# Altium PCB dc_cdi_cx500.PcbDoc (part 1 of 2)
Units mm, origin at the board's own origin, x right, y up, seen from the top; angles counter-clockwise.
Board outline 71.37 x 84.84 mm, 4 copper layers (Top, Power Plane, Ground Plane, Bottom), stack 1.586 mm thick; 162 components, 101 nets, 486 pads, 355 vias.
Unrouted connection lines stored in the file: 55.
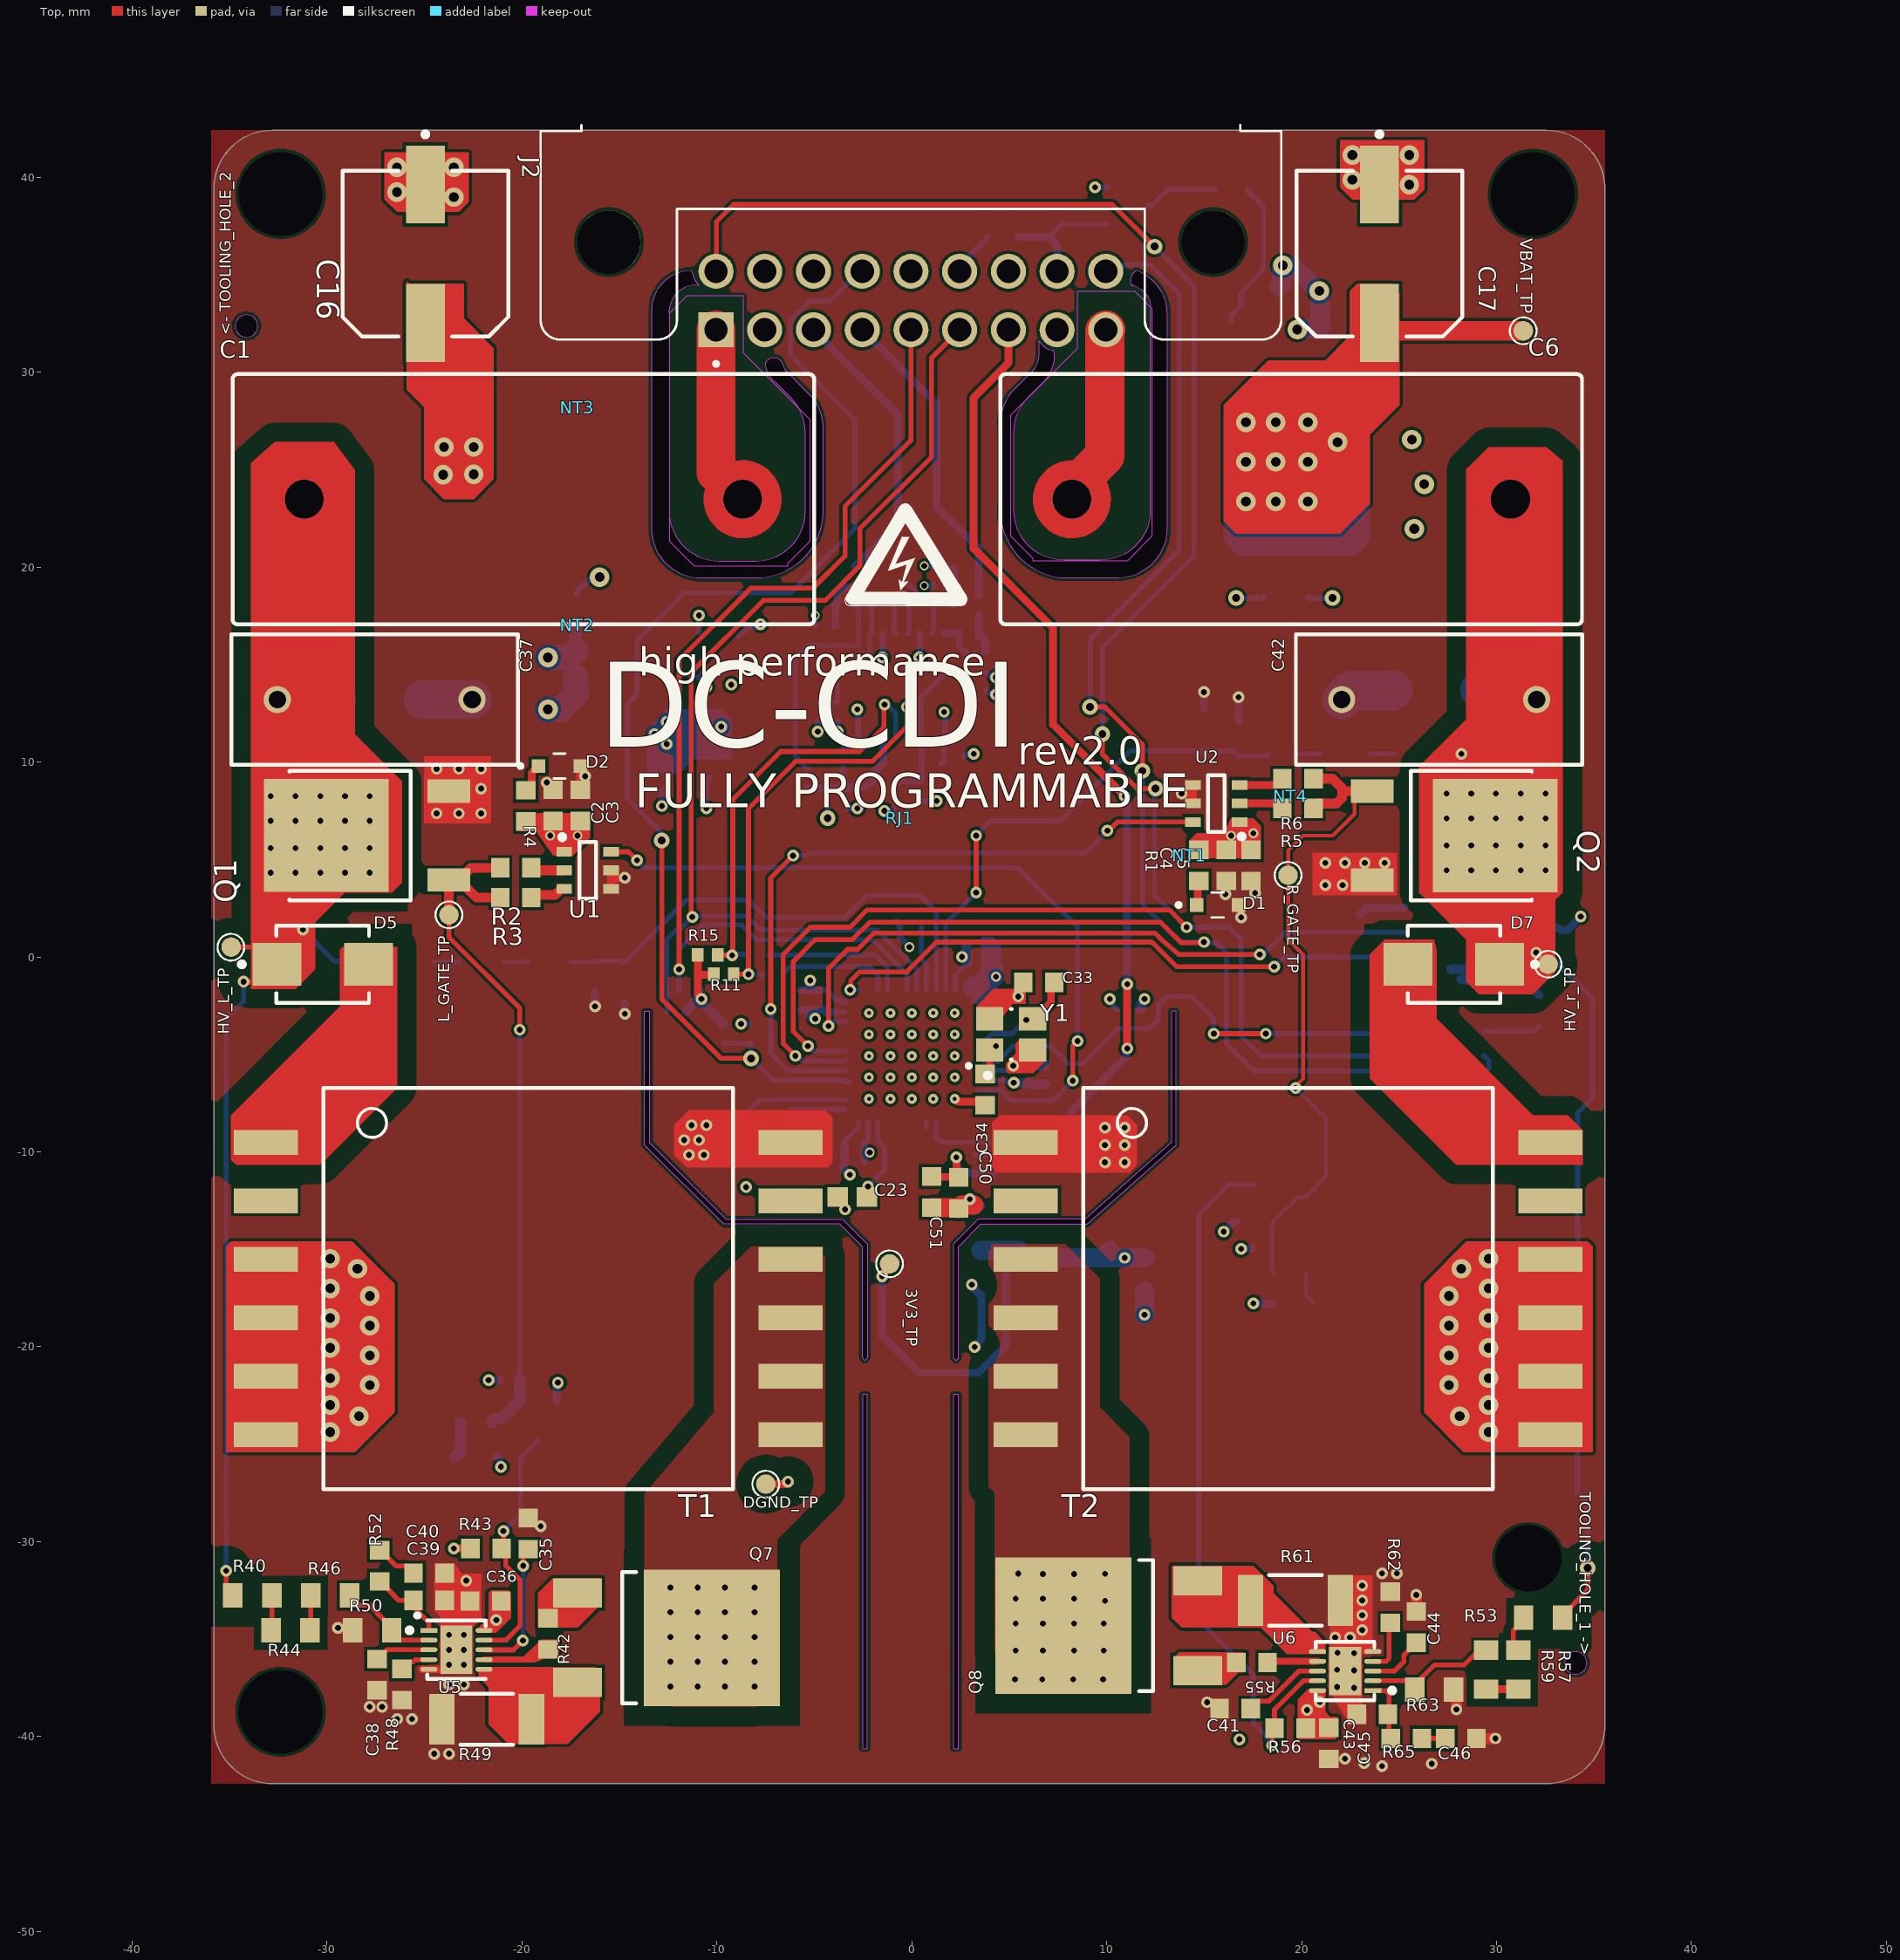
[diagram p0: Top view]
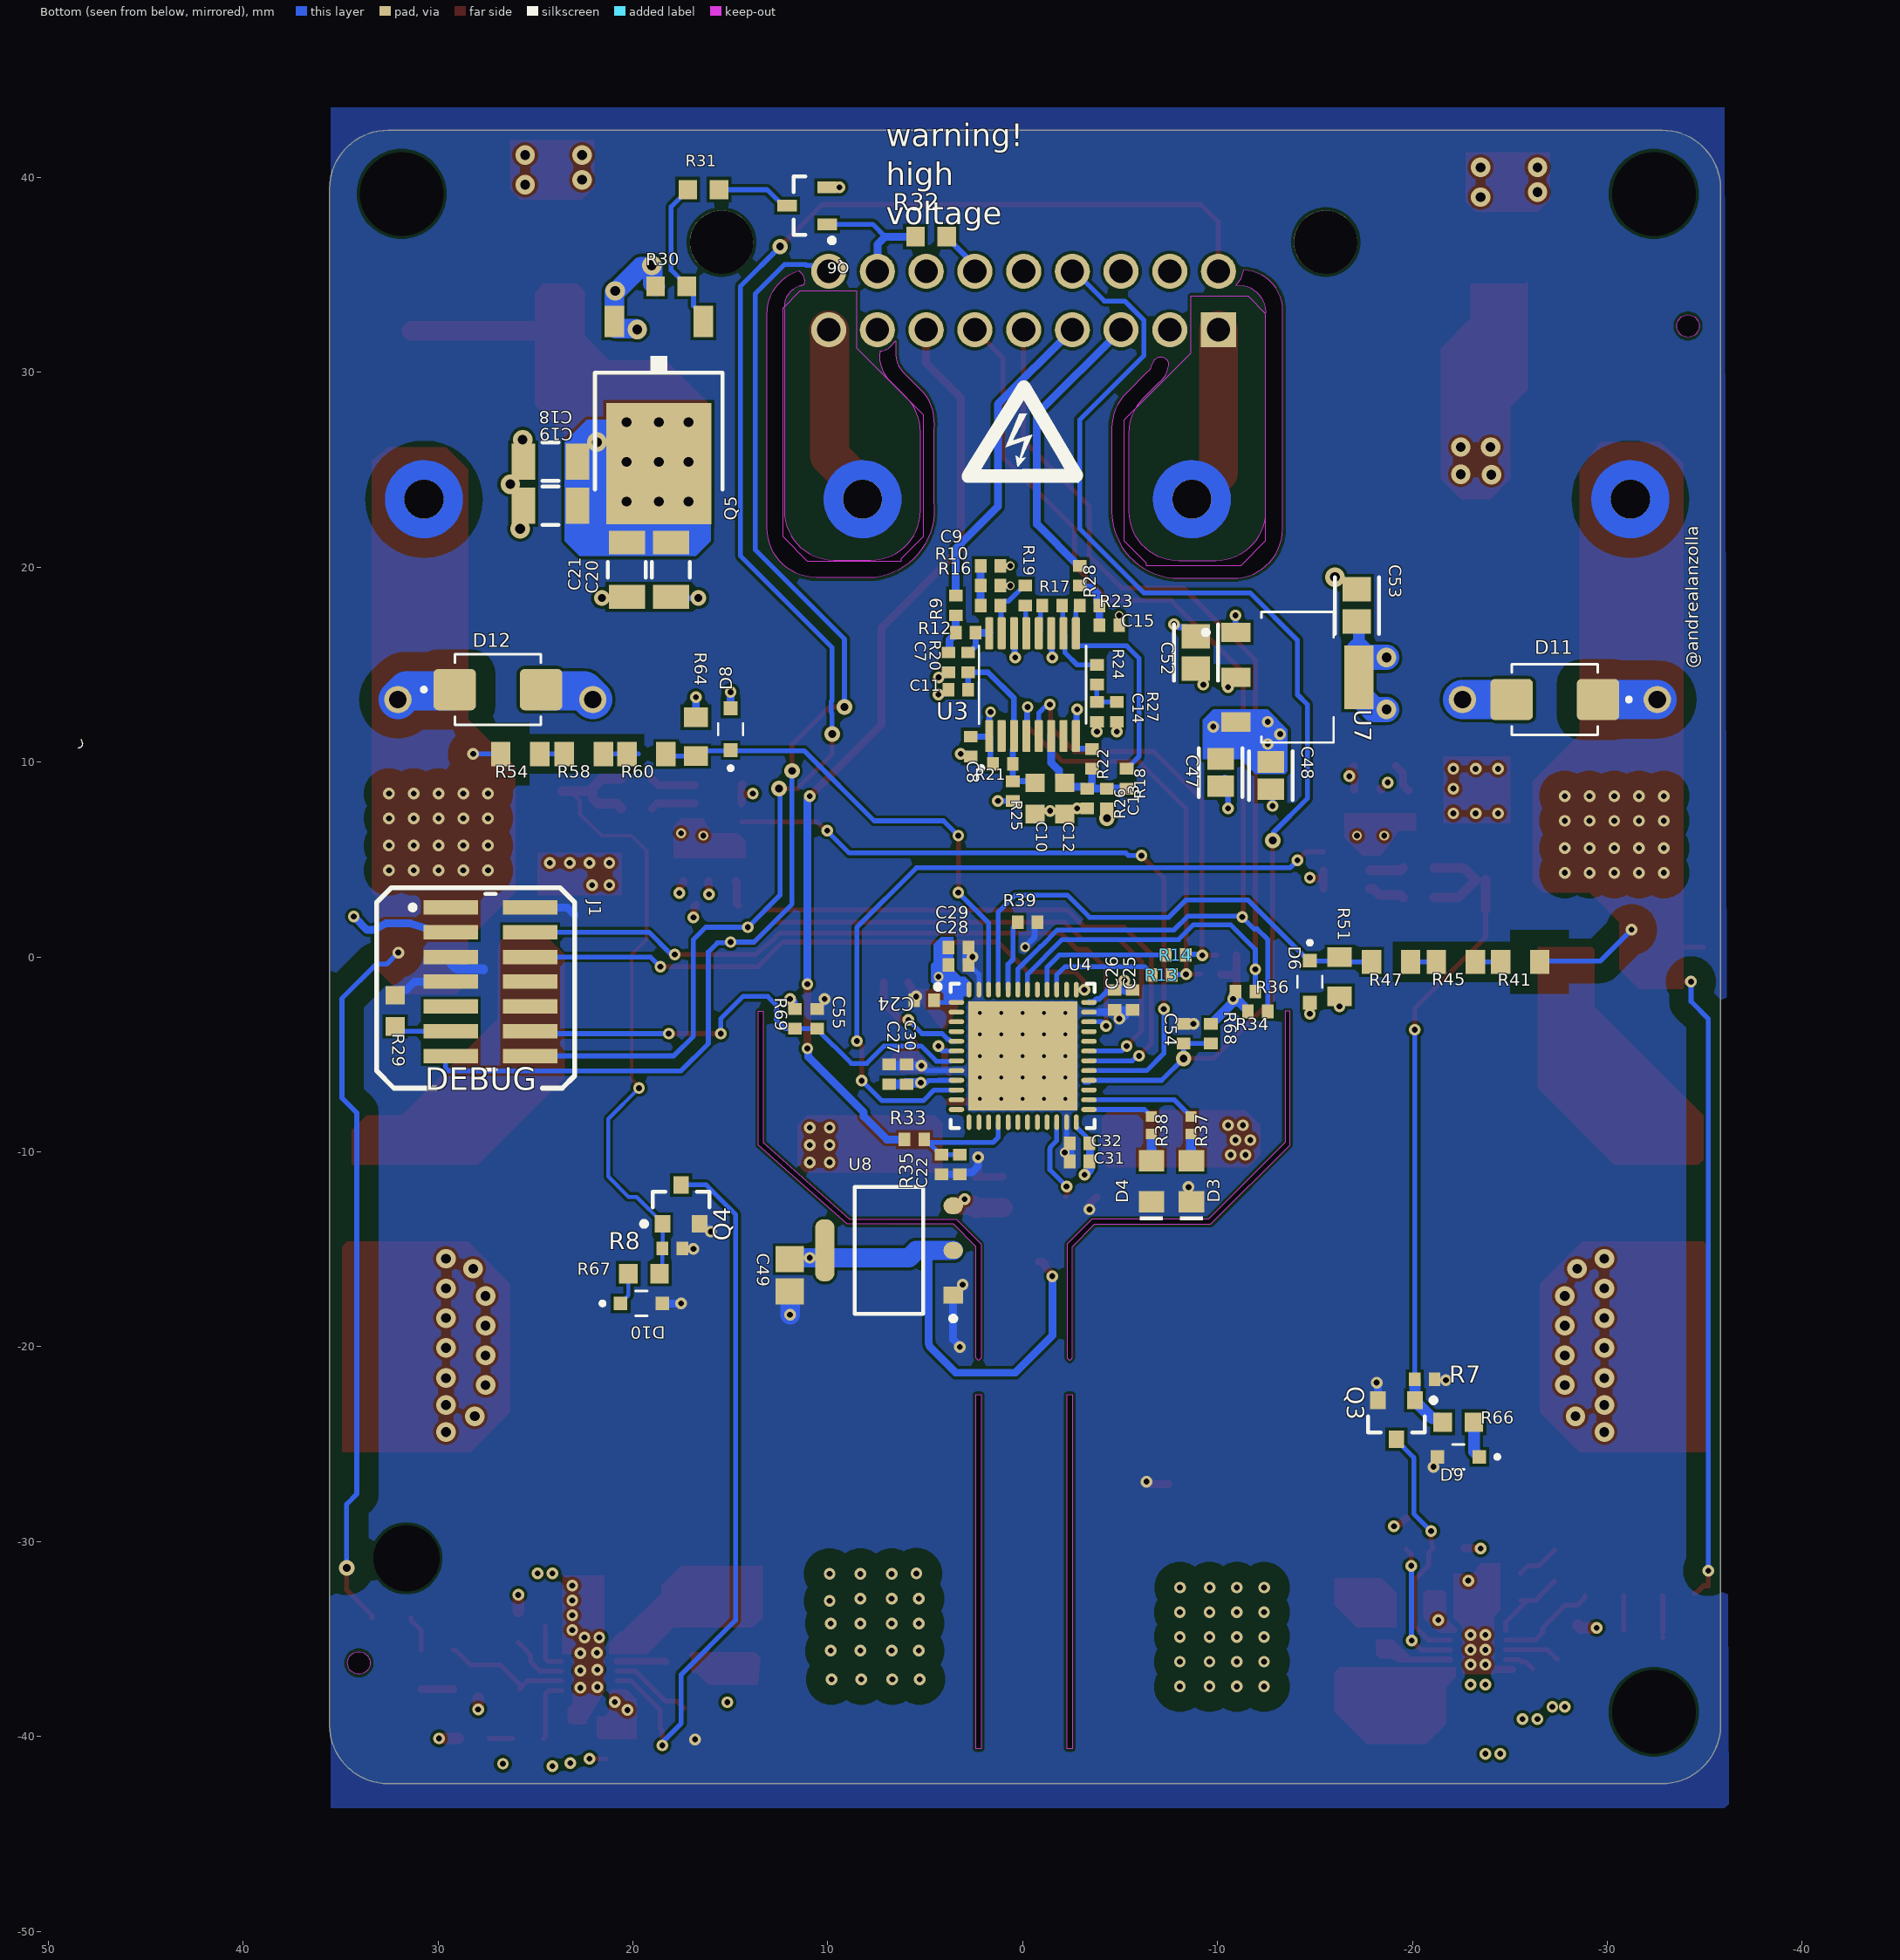
[diagram p1: Bottom view, seen from below]
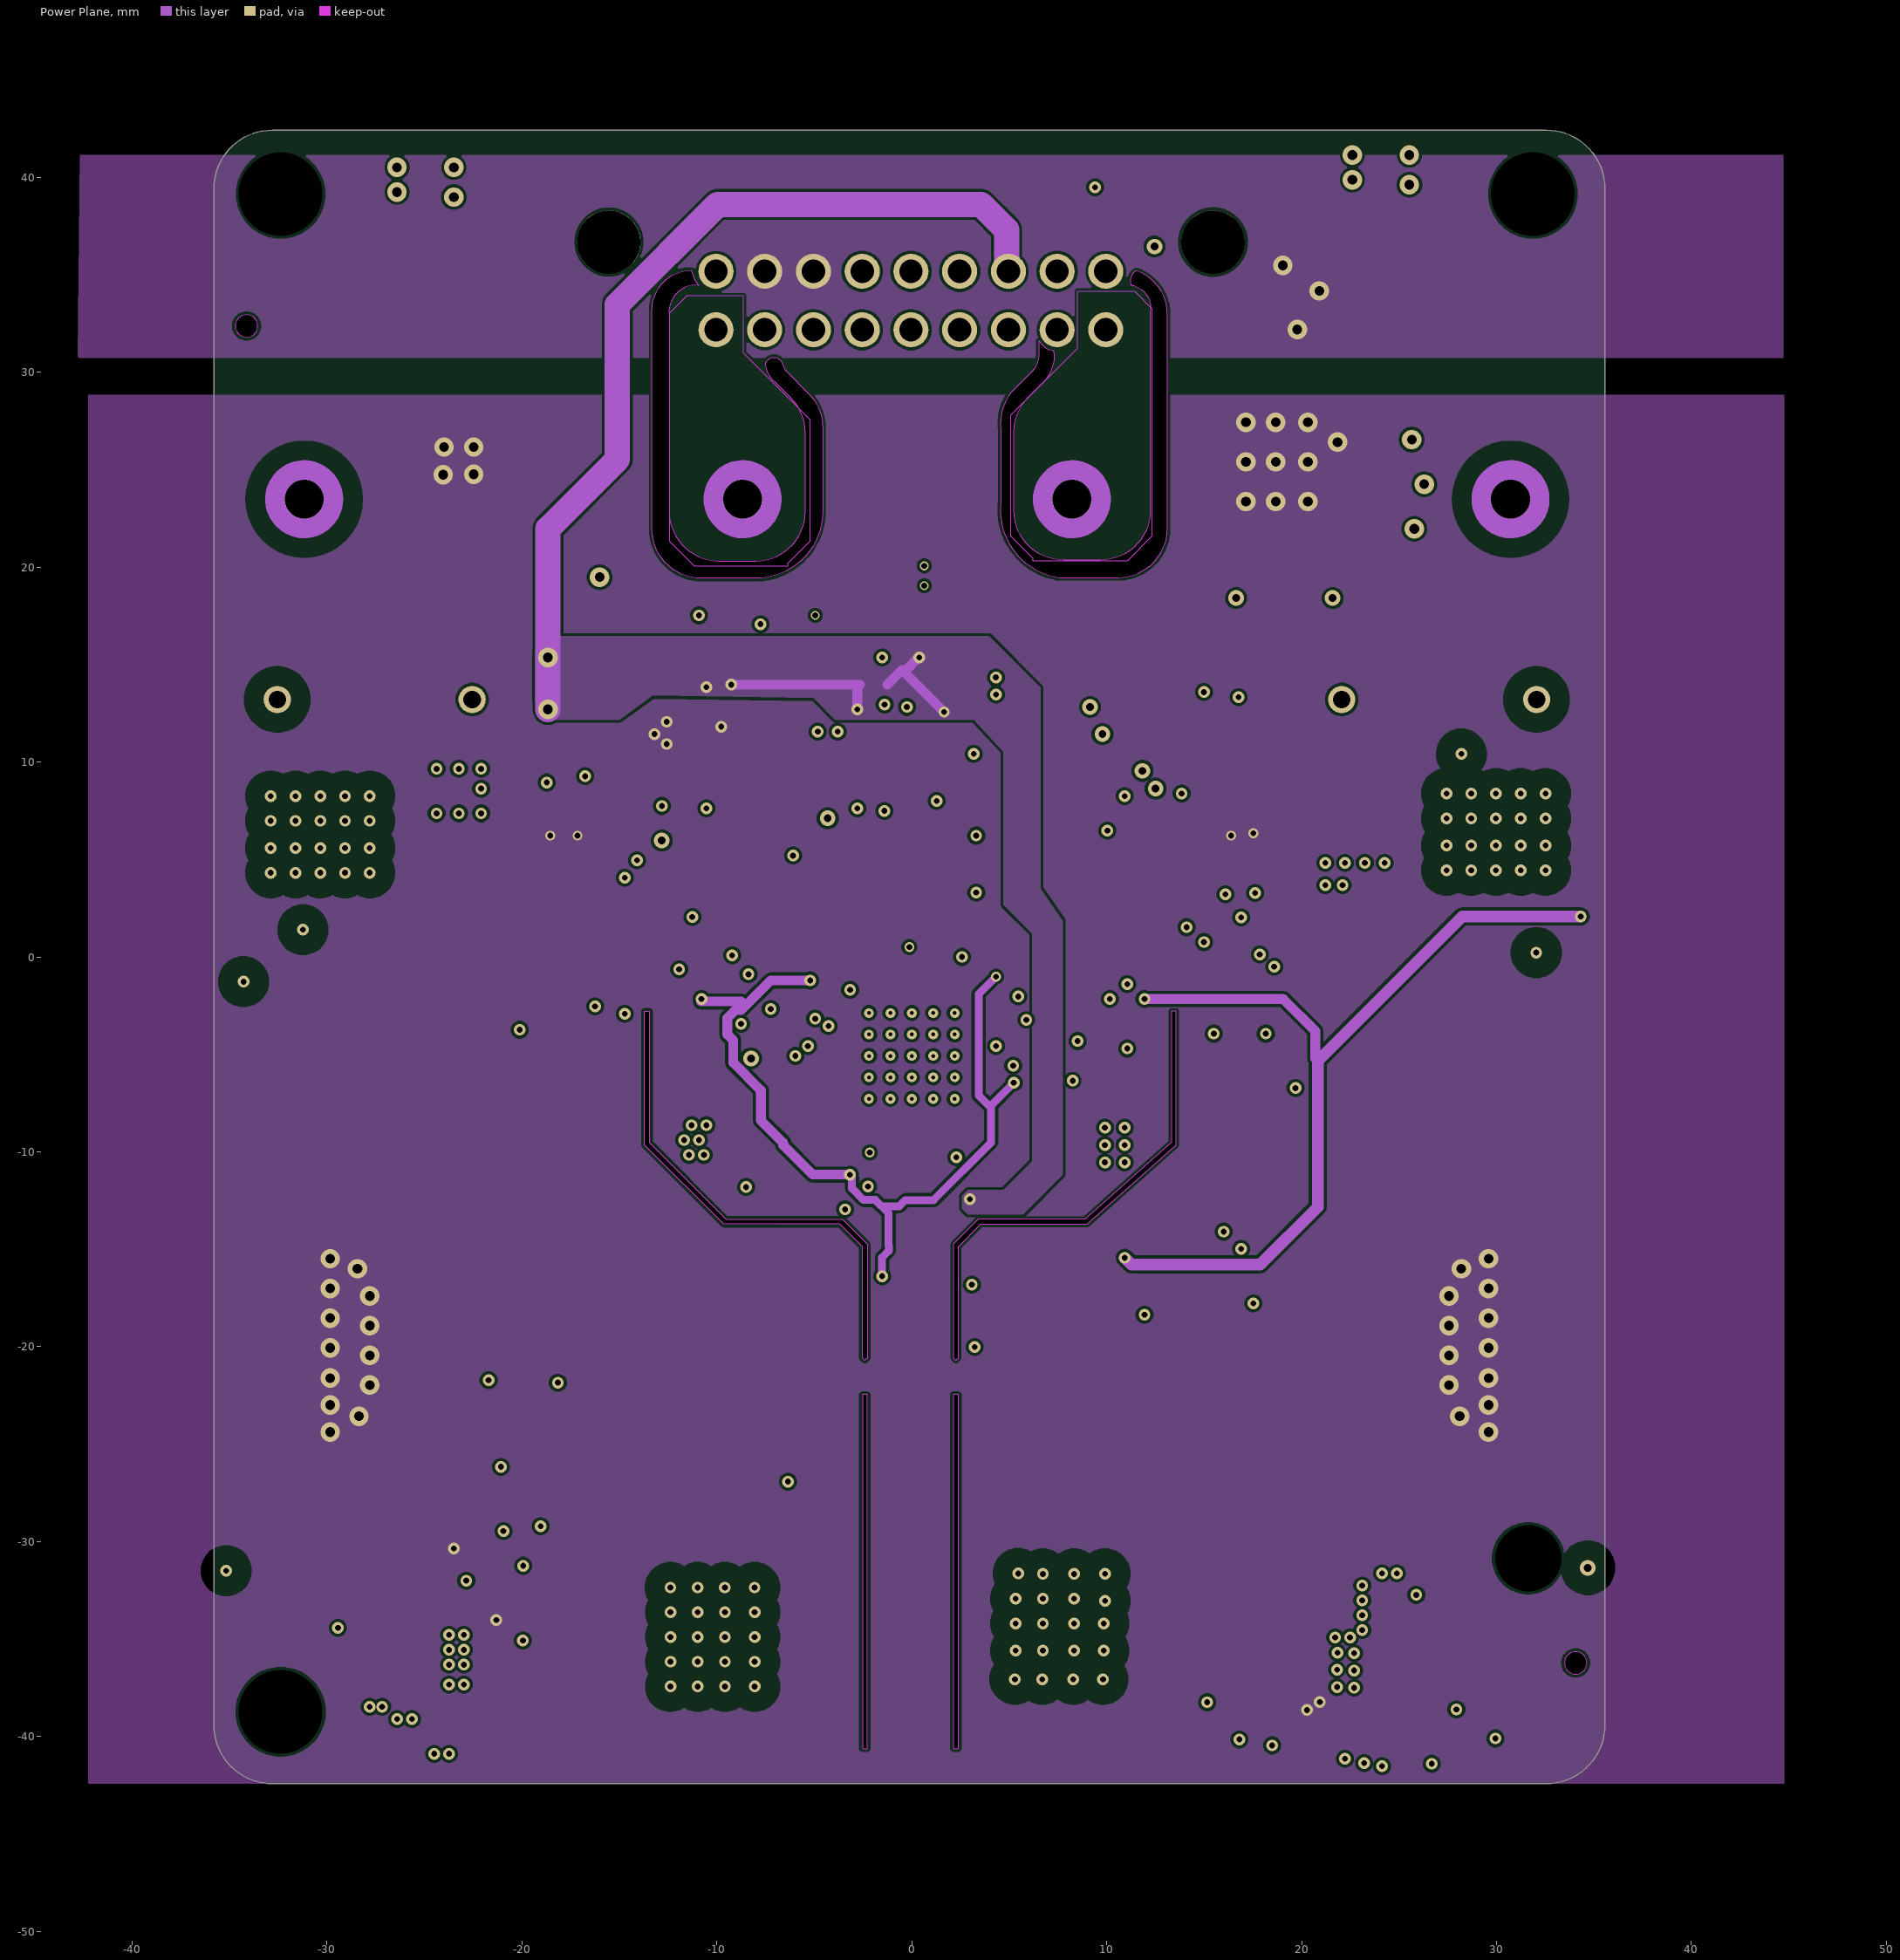
[diagram p2: Power Plane]
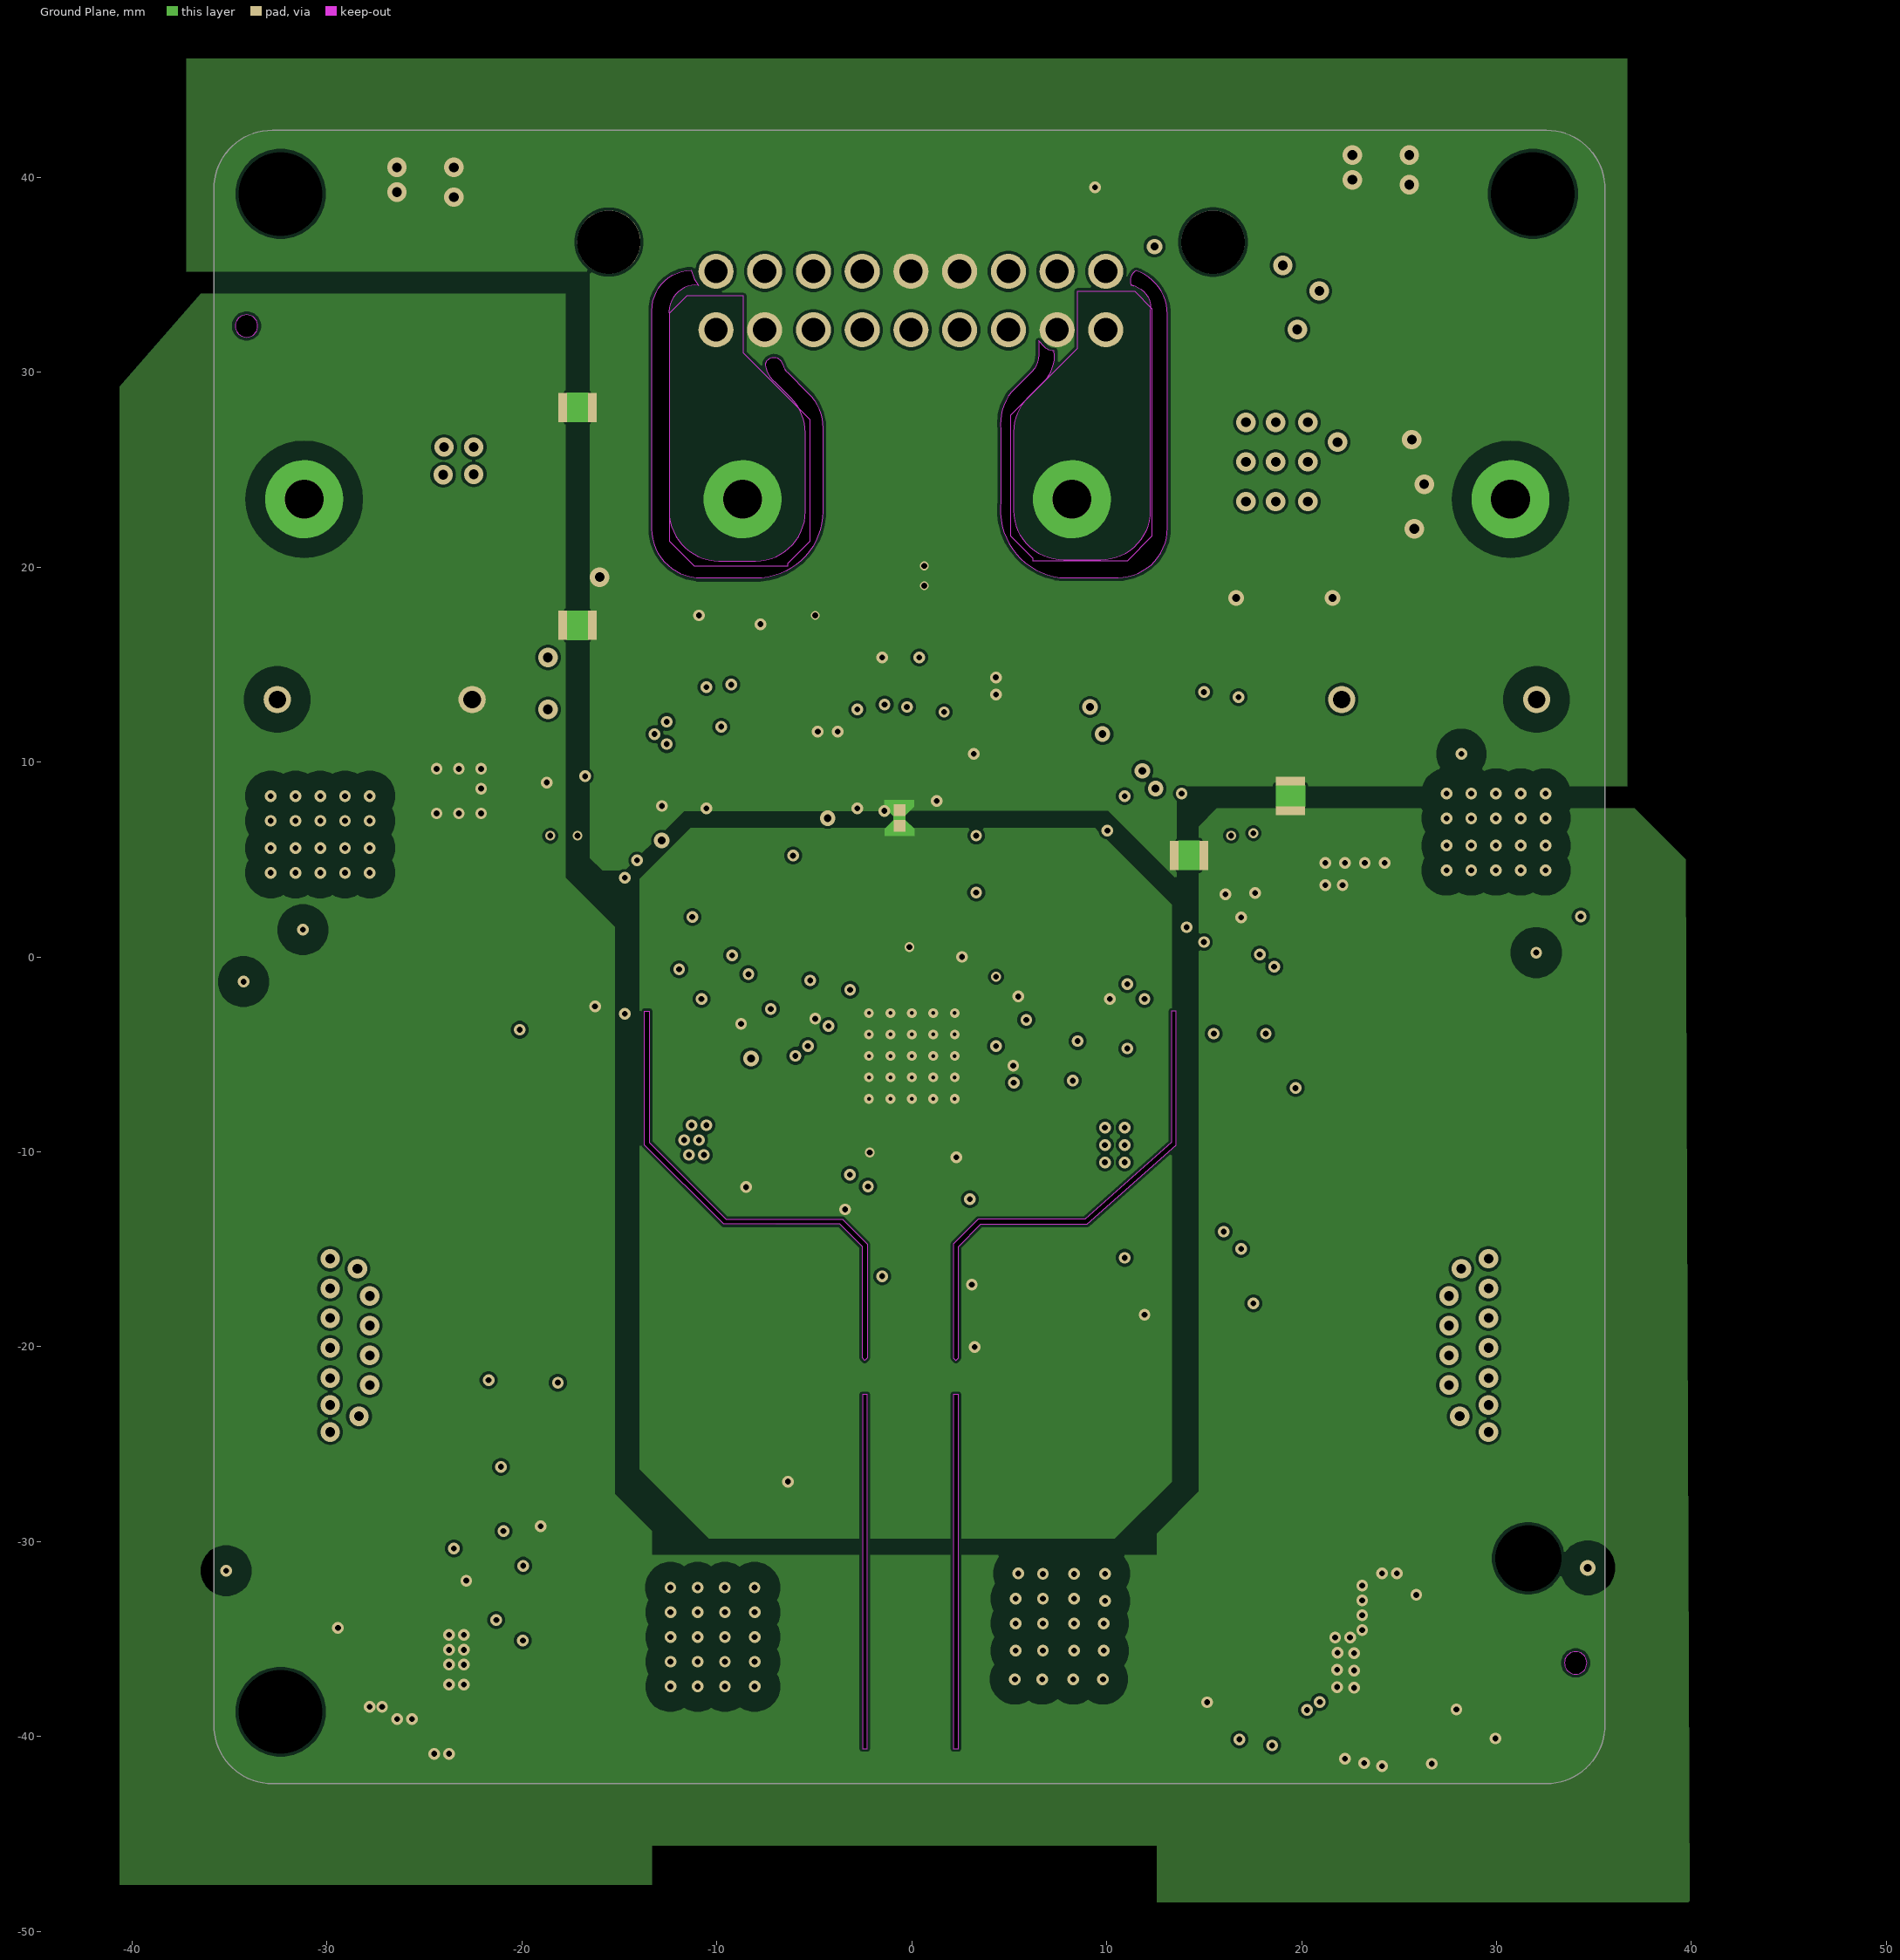
[diagram p3: Ground Plane]

## Layer stack, top to bottom
Top Solder: solder mask 0.0102, Solder Resist, Dk 3.5
Top: signal copper 0.035
Dielectric 2: prepreg 0.2104, PP-006, Dk 4.4
Power Plane: signal copper 0.0152
Dielectric 1: dielectric 1.065, FR-4, Dk 4.6
Ground Plane: signal copper 0.0152
Dielectric 3: prepreg 0.2104, PP-006, Dk 4.4
Bottom: signal copper 0.035
Bottom Solder: solder mask 0.0102, Solder Resist, Dk 3.5

## Board outline
-35.814,-39.418 -35.814,39.418 cw(c-32.814,39.418) -32.814,42.418 32.56,42.418 cw(c32.56,39.418) 35.56,39.418 35.56,-39.418 cw(c32.56,-39.418) 32.56,-42.418 -32.814,-42.418 cw(c-32.814,-39.418)
cut-out: -10.933,34.466 ccw(c-11.073,33.091) -12.446,32.931 -12.446,22.86 ccw(c-9.906,22.86) -9.906,20.32 -8.001,20.32 ccw(c-8.001,22.86) -5.461,22.86 -5.461,26.888 ccw(c-8,26.888) -6.205,28.684 -6.985,29.464 cw(c-6.166,30.522) -7.493,30.353 -7.493,30.48 cw(c-7.076,30.328) -6.731,30.607 -6.604,30.353 ccw(c-6.054,30.454) -6.372,29.994 -5.316,28.938 cw(c-7.111,27.142) -4.572,27.142 -4.572,22.867 cw(c-8.008,22.867) -8.008,19.431 -10.795,19.431 cw(c-10.795,21.971) -13.335,21.971 -13.335,33.15 cw(c-11.284,33.187) -11.321,35.238 -11.176,34.798
cut-out: 11.275,34.47 cw(c11.081,33.325) 12.227,33.13 12.227,22.897 cw(c9.687,22.897) 9.687,20.357 7.782,20.357 cw(c7.782,22.897) 5.242,22.897 5.242,26.925 cw(c7.782,26.925) 5.986,28.721 6.766,29.501 ccw(c5.421,30.847) 7.323,30.847 7.306,31.1 cw(c7.268,31.705) 6.814,31.303 6.512,31.605 6.512,30.898 cw(c5.287,30.898) 6.153,30.031 5.097,28.975 ccw(c7.157,27.38) 4.572,27.051 4.572,23.385 ccw(c8.032,22.928) 7.576,19.468 10.576,19.468 ccw(c10.576,22.008) 13.116,22.008 13.116,32.983 ccw(c10.78,32.983) 11.495,35.207 ccw(c11.813,34.685) 11.236,34.481 11.396,34.436
cut-out: 34.636,-36.229 ccw(c34.06,-36.229) 34.06,-35.653 ccw(c34.06,-36.229) 33.484,-36.229 ccw(c34.06,-36.229) 34.06,-36.805 ccw(c34.06,-36.229)
cut-out: -33.561,32.374 ccw(c-34.137,32.374) -34.137,32.95 ccw(c-34.137,32.374) -34.713,32.374 ccw(c-34.137,32.374) -34.137,31.798 ccw(c-34.137,32.374)
cut-out: 13.312,-9.525 8.89,-13.462 3.406,-13.462 2.136,-14.732 2.136,-20.574 2.263,-20.701 2.39,-20.574 2.39,-14.859 3.533,-13.716 6.839,-13.716 6.843,-13.711 6.848,-13.716 8.999,-13.711 13.566,-9.652 13.566,-2.794 13.312,-2.794
cut-out: 2.134,-22.463 2.134,-40.624 2.388,-40.624 2.388,-22.463
cut-out: -2.54,-22.463 -2.54,-40.624 -2.286,-40.624 -2.286,-22.463
cut-out: -13.462,-9.525 -9.525,-13.462 -3.556,-13.462 -2.286,-14.732 -2.286,-20.574 -2.413,-20.701 -2.54,-20.574 -2.54,-14.859 -3.683,-13.716 -6.989,-13.716 -6.993,-13.711 -6.998,-13.716 -9.652,-13.716 -13.716,-9.652 -13.716,-2.794 -13.462,-2.794

## Design rules (kind name [scope] priority, off if disabled: settings)
AssemblyTestpoint [All] p1 off: testpointundercomponent=TRUE minsize=1.016 maxsize=2.54 preferedsize=1.524 minholesize=0 maxholesize=1.016 preferedholesize=0.813 testpointgrid=0.025 usegrid=TRUE gridtolerance=0 allowsidetop=TRUE allowsidebottom=TRUE
Clearance Clearance_LT3758 [InComponent('U5') OR InComponent('U6')] p1: gap=0.1 ignorepadtopadclearanceinfootprint=FALSE
Clearance Clearance_HV [InNetClass('HV_NETS')] p2: gap=1 ignorepadtopadclearanceinfootprint=TRUE
Clearance Clearance_FBNets [InNetClass('FB_NETS')] p3: gap=0.4 ignorepadtopadclearanceinfootprint=TRUE
Clearance [All] p4: gap=0.15 ignorepadtopadclearanceinfootprint=FALSE
ComponentClearance [All] p1: gap=0.01 collisioncheckmode=3 verticalgap=0.01 showdistances=FALSE
FabricationTestpoint [All] p1 off: side=3 testpointundercomponent=TRUE minsize=1.016 maxsize=2.54 preferedsize=1.524 minholesize=0 maxholesize=1.016 preferedholesize=0.813 testpointgrid=0.025 allowsidetop=TRUE allowsidebottom=TRUE usegrid=TRUE gridoriginx=0 gridoriginy=-82.423 gridtolerance=0
HoleSize [All] p1: absolutevalues=TRUE maxlimit=5 minlimit=0.02 maxpercent=80.000 minpercent=20.000
HoleToHoleClearance [All] p1 off: gap=0.254 allowstackedmicrovias=TRUE
MinimumSolderMaskSliver [All] p1 off: minsoldermaskwidth=0.254
NetAntennae [All] p1 off: netantennaetolerance=0
PasteMaskExpansion [All] p1 off: expansion=0
PlaneClearance [InNet('GND') and OnLayer('Bottom')] p1: clearance=0.8
PlaneConnect [All] p1: planeconnectstyle=Direct reliefexpansion=0.508 reliefentries=4 reliefconductorwidth=0.254 reliefairgap=0.254
PolygonConnect [All] p1: connectstyle=Direct reliefconductorwidth=0.254 reliefentries=4 polygonreliefangle="90 Angle" airgapwidth=0.254
RoutingVias [Not InNet('dGND')] p1: holewidth=0.3 width=0.45 viastyle="Through Hole" minholewidth=0.3 minwidth=0.45 maxholewidth=0.5 maxwidth=1
RoutingVias RoutingVias_stitch_mcu [InNet('DGND')] p2: holewidth=0.3 width=0.5 viastyle="Through Hole" minholewidth=0.2 minwidth=0.4 maxholewidth=0.5 maxwidth=1
SilkToSilkClearance [All] p1 off: silktosilkclearance=0.254
SilkToSolderMaskClearance [IsPad] p1 off: minsilkscreentomaskgap=0.254 clearancetoexposedcopper=TRUE
SolderMaskExpansion [All] p1 off: expansion=0.102 istentingtop=FALSE
SolderMaskExpansion SolderMaskExpansion_1 [All] p2: expansion=0 istentingtop=FALSE
SupplyNets "Schematic Supply Nets_5" [InNet('3V3')] p1: voltage=0.000
SupplyNets "Schematic Supply Nets_4" [InNet('VBAT_0')] p2: voltage=0.000
SupplyNets "Schematic Supply Nets_3" [InNet('DGND')] p3: voltage=0.000
SupplyNets "Schematic Supply Nets_2" [InNet('5V0')] p4: voltage=0.000
SupplyNets "Schematic Supply Nets_1" [InNet('GND')] p5: voltage=0.000
SupplyNets "Schematic Supply Nets" [InNet('PGND')] p6: voltage=0.000
Width [All] p1: maxlimit=5 minlimit=0.1 preferedwidth=0.254
18 further rules are at their usual default settings.

## Classes and differential pairs
net class HV_NETS: L_HV NetD5_2 NetD7_2 NetQ7_4 NetQ8_4 R_HV
net class FB_NETS: NetR40_1 NetR41_1 NetR44_1 NetR45_1 NetR53_1 NetR54_1 NetR57_1 NetR58_1
component class LV_power: C47 C48 C49 C50 C51 C52 C53 U7 U8
component class logic: C22 C23 C24 C25 C26 C27 C28 C29 C30 C31 C32 C33 C34 C54 C55 D3 D4 R33 R34 R35 R36 R37 R38 R39 R68 R69 U4 Y1
component class input_signal_conditioning: C7 C8 C9 C10 C11 C12 C13 C14 C15 R9 R10 R11 R12 R13 R14 R15 R16 R17 R18 R19 R20 R21 R22 R23 R24 R25 R26 R27 R28 U3
component class input_output: C16 C17 C18 C19 C20 C21 J1 J2 NT1 NT2 NT3 NT4 Q5 Q6 R29 R30 R31 R32 RJ1
component class HV_power: C35 C36 C37 C38 C39 C40 C41 C42 C43 C44 C45 C46 D5 D6 D7 D8 Q7 Q8 R40 R41 R42 R43 R44 R45 R46 R47 R48 R49 R50 R51 R52 R53 R54 R55 R56 R57 R58 R59 R60 R61 R62 R63 R64 R65 T1 T2 U5 U6
component class cd_switching: C1 C2 C3 C4 C5 C6 D1 D2 D9 D10 D11 D12 Q1 Q2 Q3 Q4 R1 R2 R3 R4 R5 R6 R7 R8 R66 R67 U1 U2

## Components (designator, comment, footprint, x,y, rotation, side; value= is the part's Value field where it differs from the comment)
C1 "ECW-FA2J155J" 22,5mm_CAP -19.929,23.485 r180 top locked
C2 "Capacitor_0603" 0603_FP -18.409,7.769 r90 top value="100 nF"
C3 "Capacitor_0603" 0603_FP -17.012,7.769 r90 top value="100 nF"
C4 "Capacitor_0603" 0603_FP 16.129,4.699 r270 top value="100 nF"
C5 "Capacitor_0603" 0603_FP 17.399,4.699 r270 top value="100 nF"
C6 "ECW-FA2J155J" 22,5mm_CAP 19.467,23.485 r0 top locked
C7 "Capacitor_0402" 0402_fp 3.81,15.113 r270 bottom value="1 nF"
C8 "Capacitor_0402" 0402_fp 2.667,10.795 r270 bottom value="100 nF"
C9 "Capacitor_0402" 0402_fp 1.651,20.066 r180 bottom value="1 nF"
C10 "Capacitor_0603" 0603_FP -0.635,8.128 r270 bottom value="10 uF"
C11 "Capacitor_0402" 0402_fp 3.302,13.716 r0 bottom value="100 nF"
C12 "Capacitor_0603" 0603_FP -2.159,8.128 r270 bottom value="10 uF"
C13 "Capacitor_0402" 0402_fp -4.318,8.128 r270 bottom value="100 nF"
C14 "Capacitor_0402" 0402_fp -3.81,12.573 r270 bottom value="1 nF"
C15 "Capacitor_0402" 0402_fp -4.445,17.018 r180 bottom value="1 nF"
C16 "EEHZT1E221P" FP-EEH-F-MFG -24.96,36.085 r270 top
C17 "EEHZT1E221P" FP-EEH-F-MFG 23.994,36.085 r270 top
C18 "C1206X104J3GACTU" FP-C1206X104J3GACTU-MFG 24.229,25.413 r0 bottom
C19 "C1206X104J3GACTU" FP-C1206X104J3GACTU-MFG 24.229,23.153 r0 bottom
C20 "C1206X104J3GACTU" FP-C1206X104J3GACTU-MFG 18.047,19.871 r270 bottom
C21 "C1206X104J3GACTU" FP-C1206X104J3GACTU-MFG 20.307,19.871 r270 bottom
C22 "Capacitor_0402" 0402_fp 3.224,-10.648 r90 bottom value="1 nF"
C23 "0603ZD475MAT2A" CAPC1608X90X35NL15T15 -3.048,-12.319 r180 top
C24 "Capacitor_0402" 0402_fp 5.058,-2.225 r0 bottom value="100 nF"
C25 "Capacitor_0402" 0402_fp -5.636,-2.209 r270 bottom value="10 nF"
C26 "Capacitor_0402" 0402_fp -4.713,-2.209 r270 bottom value="10 nF"
C27 "Capacitor_0402" 0402_fp 6.858,-6.025 r90 bottom value="10 nF"
C28 "Capacitor_0402" 0402_fp 3.292,-0.412 r180 bottom value="10 nF"
C29 "Capacitor_0402" 0402_fp 3.292,0.488 r180 bottom value="10 nF"
C30 "Capacitor_0402" 0402_fp 5.95,-6.025 r90 bottom value="10 nF"
C31 "Capacitor_0402" 0402_fp -2.92,-10.494 r0 bottom value="10 nF"
C32 "Capacitor_0402" 0402_fp -2.92,-9.559 r0 bottom value="10 nF"
C33 "Capacitor_0603" 0603_FP 6.513,-1.303 r180 top value="10 pF"
C34 "Capacitor_0603" 0603_FP 3.763,-6.803 r270 top value="10 pF"
C35 "GRM21BR61C475KA88L" 0603_FP -19.685,-29.591 r270 top value="4.7 uF"
C36 "GRM21BR61C475KA88L" 0603_FP -21.873,-33.055 r180 top value=".22 uF"
C37 "890283323005CS" WCAP-FTBP_L13W5.5H11 -27.559,13.208 r180 top
C38 "Capacitor_0603" 0603_FP -27.432,-36.83 r90 top value="100 pF"
C39 "Capacitor_0603" 0603_FP -24.765,-33.02 r180 top value="22 pF"
C40 "Capacitor_0603" 0603_FP -24.765,-31.623 r180 top value="470 pF"
C41 "Capacitor_0603" 0603_FP 16.586,-38.564 r0 top value="4.7 uF"
C42 "890283323005CS" WCAP-FTBP_L13W5.5H11 27.055,13.208 r0 top
C43 "GRM21BR61C475KA88L" 0603_FP 21.396,-40.357 r270 top value=".22 uF"
C44 "Capacitor_0603" 0603_FP 25.881,-34.388 r90 top value="100 pF"
C45 "Capacitor_0603" 0603_FP 23.622,-38.862 r180 top value="22 pF"
C46 "Capacitor_0603" 0603_FP 28.167,-40.103 r0 top value="470 pF"
C47 "CC0805MKX5R8BB226" FP-CC0805-0_2-1_45-IPC_C -10.159,9.464 r270 bottom
C48 "CC0805MKX5R8BB226" FP-CC0805-0_2-1_45-IPC_C -12.728,9.302 r270 bottom
C49 "0805ZG106ZAT2A" CAPC2013X152X50NL20T25 11.955,-16.332 r90 bottom
C50 "Capacitor_0603" 0603_FP 2.404,-12.111 r90 top value="100 nF"
C51 "Capacitor_0603" 0603_FP 1.016,-12.065 r90 top value="100 nF"
C52 "GRM21BR61A476ME15K" FP-GRM21B-0_2-e0_2_0_7-IPC_B -8.89,15.621 r90 bottom
C53 "GRM21BR61A476ME15K" FP-GRM21B-0_2-e0_2_0_7-IPC_B -17.145,18.034 r90 bottom
C54 "Capacitor_0402" 0402_fp -8.255,-3.937 r90 bottom value="100 nF"
C55 "Capacitor_0402" 0402_fp 10.541,-3.175 r90 bottom value="100 nF"
D1 "BZT52B15SH_RRG" DIO_BZT52B15SH_RRG 15.689,2.667 r0 top
D2 "BZT52B15SH_RRG" DIO_BZT52B15SH_RRG -18.076,9.796 r0 top
D3 "150080RS75000" WL-SMCW_0805_150080xx75000 -8.658,-11.509 r90 bottom
D4 "150080GS75000" WL-SMCW_0805_150080xx75000 -6.604,-11.509 r90 bottom
D5 "S3JB" FP-403AF-MFG -30.226,-0.381 r0 top
D6 "CZRQR3V3B-HF" DIO_BZT52B15SH_RRG -14.732,-1.27 r270 bottom
D7 "S3JB" FP-403AF-MFG 27.814,-0.381 r180 top
D8 "BZT52B15SH_RRG" DIO_BZT52B15SH_RRG 14.986,11.684 r90 bottom
D9 "BZT52B15SH_RRG" DIO_BZT52B15SH_RRG -22.352,-25.654 r0 bottom
D10 "BZT52B15SH_RRG" DIO_BZT52B15SH_RRG 19.558,-17.78 r180 bottom
D11 "SMBJ400A" DIOM5436X261N -27.305,13.208 r0 bottom
D12 "SMBJ400A" DIOM5436X261N 26.924,13.716 r180 bottom
J1 "FTSH-107-01-F-DV-K" FP-FTSH-107-01-F-DV-K-MFG 27.305,-1.27 r270 bottom
J2 "MX23A18NF1" JAE_MX23A18NF1 -0.047,36.679 r180 top
NT1 "GROUND_NET_TIE" NET_TIE_GND#1 14.224,5.207 r270 top net-tie
NT2 "GROUND_NET_TIE" NET_TIE_GND#1 -17.161,17.018 r90 top net-tie
NT3 "GROUND_NET_TIE" NET_TIE_GND#1 -17.161,28.194 r90 top net-tie
NT4 "GROUND_NET_TIE" NET_TIE_GND#2 19.431,8.255 r0 top net-tie
Q1 "IPD60R180C7ATMA1" FP-PG-TO252-3-MFG#1 -28.829,6.229 r90 top
Q2 "IPD60R180C7ATMA1" FP-PG-TO252-3-MFG#1 28.702,6.223 r270 top
Q3 "MGSF1N03LT1G" ONSC-SOT-23-3-318-08_V -19.177,-23.749 r270 bottom
Q4 "MGSF1N03LT1G" ONSC-SOT-23-3-318-08_V 17.526,-12.7 r90 bottom
Q5 "FDD4141" TO252 18.669,27.813 r0 bottom
Q6 "BSS316N" SOT95P260X110-3N 11.058,38.542 r0 bottom
Q7 "IPD50R280CE" FP-PG-TO252-3-MFG#2 -12.585,-34.936 r270 top
Q8 "IPD50R280CE" FP-PG-TO252-3-MFG#2 10.1,-34.314 r90 top
R1 "Resistor_0603" 0603_FP 14.732,4.699 r90 top value="470 Ohm"
R2 "Resistor_0603" 0603_FP -20.32,4.572 r0 top value="10 Ω"
R3 "Resistor_0603" 0603_FP -20.32,3.048 r0 top value="120 Ω"
R4 "Resistor_0603" 0603_FP -19.812,7.747 r270 top value="470 Ohm"
R5 "Resistor_0603" 0603_FP 19.812,7.62 r180 top value="10 Ω"
R6 "Resistor_0603" 0603_FP 19.812,9.144 r180 top value="120 Ω"
R7 "Resistor_0402" 0402_fp -20.628,-21.674 r180 bottom value="10 kOhm"
R8 "Resistor_0402" 0402_fp 17.975,-14.957 r180 bottom value="10 kOhm"
R9 "Resistor_0402" 0402_fp 3.429,18.034 r90 bottom value="10 kΩ"
R10 "Resistor_0402" 0402_fp 1.651,19.05 r180 bottom value="10 kΩ"
R11 "Resistor_0402" 0402_fp -9.652,-0.889 r0 top value="12 kΩ"
R12 "Resistor_0402" 0402_fp 2.921,16.637 r180 bottom value="12 kΩ"
R13 "Resistor_0402" 0402_fp -7.135,-0.92 r180 bottom value="1 kΩ"
R14 "Resistor_0402" 0402_fp -7.854,0.099 r180 bottom value="1 kΩ"
R15 "Resistor_0402" 0402_fp -10.474,0.099 r0 top value="12 kΩ"
R16 "Resistor_0402" 0402_fp 1.651,18.034 r180 bottom value="12 kΩ"
R17 "Resistor_0402" 0402_fp -1.516,18.028 r180 bottom value="12 kΩ"
R18 "Resistor_0402" 0402_fp -5.334,9.144 r90 bottom value="12 kΩ"
R19 "Resistor_0402" 0402_fp -0.127,18.542 r90 bottom value="12 kΩ"
R20 "Resistor_0402" 0402_fp 2.794,15.113 r90 bottom value="12 kΩ"
R21 "Resistor_0402" 0402_fp 1.016,9.906 r0 bottom value="1 kΩ"
R22 "Resistor_0402" 0402_fp -3.556,10.16 r90 bottom value="1 kΩ"
R23 "Resistor_0402" 0402_fp -3.429,18.034 r0 bottom value="12 kΩ"
R24 "Resistor_0402" 0402_fp -3.81,14.478 r90 bottom value="12 kΩ"
R25 "Resistor_0402" 0402_fp 0.508,8.509 r270 bottom value="1 kΩ"
R26 "Resistor_0402" 0402_fp -3.302,8.128 r270 bottom value="1 kΩ"
R27 "Resistor_0402" 0402_fp -4.826,12.573 r270 bottom value="10 kΩ"
R28 "Resistor_0402" 0402_fp -2.921,19.558 r90 bottom value="10 kΩ"
R29 "Resistor_0603" 0603_FP 32.195,-2.768 r90 bottom value="10 kOhm"
R30 "Resistor_0603" 0603_FP 18.034,34.417 r0 bottom value="10 kOhm"
R31 "Resistor_0603" 0603_FP 16.383,39.37 r0 bottom value="1 kOhm"
R32 "Resistor_0603" 0603_FP 4.699,36.957 r0 bottom value="10 kOhm"
R33 "Resistor_0402" 0402_fp 5.558,-9.37 r180 bottom value="12 kΩ"
R34 "Resistor_0402" 0402_fp -12.065,-2.794 r180 bottom value="4.7 kΩ"
R35 "Resistor_0402" 0402_fp 4.166,-10.648 r90 bottom value="22 kΩ"
R36 "Resistor_0402" 0402_fp -11.43,-1.778 r180 bottom value="4.7 kΩ"
R37 "MCS04020D5600BE100" RESC1005X37X20NL05T10 -8.636,-8.636 r270 bottom
R38 "MCS04020D5600BE100" RESC1005X37X20NL05T10 -6.604,-8.636 r270 bottom
R39 "Resistor_0402" 0402_fp -0.254,1.778 r180 bottom value="10 kΩ"
R40 "R_0805" 0805_FP -33.837,-32.766 r180 top value="1 MΩ"
R41 "R_0805" 0805_FP -25.527,-0.254 r180 bottom value="1 MΩ"
R42 "Resistor_0603" 0603_FP -18.66,-34.737 r90 top value="22 Ω"
R43 "Resistor_0603" 0603_FP -21.844,-30.353 r180 top value="470 kOhm"
R44 "R_0805" 0805_FP -31.877,-34.544 r180 top value="1 MΩ"
R45 "R_0805" 0805_FP -22.225,-0.254 r180 bottom value="1 MΩ"
R46 "R_0805" 0805_FP -29.845,-32.766 r180 top value="1 MΩ"
R47 "R_0805" 0805_FP -18.907,-0.254 r180 bottom value="1 MΩ"
R48 "Resistor_0603" 0603_FP -26.161,-37.33 r90 top value="140 kOhm"
R49 "CSRN2010FK20L0" FP-CSRN2010-IPC_B -21.813,-39.122 r0 top
R50 "R_0805" 0805_FP -27.686,-34.544 r0 top value="13.7 kΩ"
R51 "R_0805" 0805_FP -16.256,-1.016 r90 bottom value="24 kΩ"
R52 "Resistor_0603" 0603_FP -27.305,-31.242 r270 top value="82 kΩ"
R53 "R_0805" 0805_FP 32.385,-33.909 r0 top value="1 MΩ"
R54 "R_0805" 0805_FP 25.781,10.414 r0 bottom value="1 MΩ"
R55 "Resistor_0603" 0603_FP 17.45,-36.209 r180 top value="22 Ω"
R56 "Resistor_0603" 0603_FP 19.408,-39.582 r180 top value="470 kΩ"
R57 "R_0805" 0805_FP 31.115,-36.576 r90 top value="1 MΩ"
R58 "R_0805" 0805_FP 22.517,10.414 r0 bottom value="1 MΩ"
R59 "R_0805" 0805_FP 29.464,-36.576 r270 top value="1 MΩ"
R60 "R_0805" 0805_FP 19.304,10.414 r0 bottom value="1 MΩ"
R61 "CSRN2010FK20L0" FP-CSRN2010-IPC_B 19.685,-33.02 r180 top
R62 "Resistor_0603" 0603_FP 24.55,-33.37 r90 top value="140 kΩ"
R63 "R_0805" 0805_FP 26.797,-37.592 r180 top value="13.7 kΩ"
R64 "R_0805" 0805_FP 16.764,11.303 r270 bottom value="24 kΩ"
R65 "Resistor_0603" 0603_FP 25.373,-40.103 r0 top value="82 kΩ"
R66 "Resistor_0603" 0603_FP -22.352,-23.876 r180 bottom value="470 Ohm"
R67 "Resistor_0603" 0603_FP 19.431,-16.256 r0 bottom value="470 Ohm"
R68 "Resistor_0402" 0402_fp -9.652,-3.937 r90 bottom value="4.7 kΩ"
R69 "Resistor_0402" 0402_fp 11.684,-3.175 r90 bottom value="4.7 kΩ"
RJ1 "Net Tie 12x8mil" SHORT06-FP -0.635,7.131 r270 top net-tie
T1 "DA2034-AL" DA2034-AL -19.685,-17.018 r0 top
T2 "DA2034-AL" DA2034-AL 19.304,-17.018 r0 top
U1 "1EDN7511B" SOT95P280X145-6N-7-V -16.637,4.445 r0 top
U2 "1EDN7511B" SOT95P280X145-6N-7-V 15.621,7.874 r180 top
U3 "MAX9927AEE+" SOP63P602X175-16N -0.508,13.97 r90 bottom
U4 "STM32F411CEU6" STM-UFQFPN48_L 0,-5.08 r180 bottom
U5 "LT3758EDD#PBF" FP-DD-10-05-08-1699-IPC_B -23.364,-35.555 r0 top
U6 "LT3758EDD#PBF" FP-DD-10-05-08-1699-IPC_B 22.233,-36.645 r180 top
U7 "LT1117CST-3.3#TRPBF" REG_LT1117CST-3.3#TRPBF -14.097,14.351 r180 bottom
U8 "AMS1117-3.3" FP-AMS1117-IPC_C 6.858,-15.058 r0 bottom
Y1 "NX3225GA-16.000M-STD-CRG-2" FP-NX3225GA-MFG 5.096,-3.978 r0 top

## Footprints (in the part's own frame and the unit in brackets; to place one, negate y for a bottom-side part, rotate by r counter-clockwise, add the part's x,y. Pads: shape width x height; smd on the part's side, far side on the other; paste and mask are expansions set on the pad)
22,5mm_CAP [mm]
  round 2 hole 2 mask-2539.97: 1(-11.25,0) 2(11.25,0)
  Top circle w2: c11.25,0 r1
  Top circle w2: c-11.25,0 r1
  Power Plane circle w2: c11.25,0 r1
  Power Plane circle w2: c-11.25,0 r1
  Ground Plane circle w2: c11.25,0 r1
  Ground Plane circle w2: c-11.25,0 r1
  Bottom circle w2: c11.25,0 r1
  Bottom circle w2: c-11.25,0 r1
  silkscreen extent -14.92,-6.42 14.92,6.42
0402_fp [mm]
  rect 0.6x0.7 smd mask+0.05: 1(-0.508,0) 2(0.508,0)
0603_FP [mm]
  rect 0.95x1 smd mask+0.05: 1(-0.8,0) 2(0.8,0)
0805_FP [mm]
  rect 1x1.25 smd mask+0.05: 1(-1,0) 2(1,0)
CAPC1608X90X35NL15T15 [mm] "Chip Capacitor, 2-Leads, Body 1.60x0.81mm, IPC Medium Density"
  rect 1.05x1 smd: 1(-0.75,0) 2(0.75,0)
  body extent -0.88,-0.48 0.87,0.48, height 0.9
CAPC2013X152X50NL20T25 [mm] "Chip Capacitor, 2-Leads, Body 2.01x1.25mm, IPC Medium Density"
  rect 1.35x1.45 smd: 1(-0.825,0) 2(0.825,0)
  body extent -1.1,-0.72 1.11,0.72, height 1.52
DA2034-AL [mm]
  rect 3.3x1.27 smd: P$1(-13.46,7.5) P$2(-13.46,4.5) P$3(-13.46,1.5) P$4(-13.46,-1.5) P$5(-13.46,-4.5) P$6(-13.46,-7.5) P$7(13.46,-7.5) P$8(13.46,-4.5) P$9(13.46,-1.5) P$10(13.46,1.5) P$11(13.46,4.5) P$12(13.46,7.5)
  silkscreen extent -10.5,-10.29 10.5,10.29, body extent -14.33,-10.29 14.33,10.29, height 11.18
DIO_BZT52B15SH_RRG [mm]
  rect 0.7x0.7 smd paste+0 mask+0.102: 1(-1.075,0) 2(1.075,0)
  silkscreen extent -2.1,-0.64 0.3,0.64, body extent -1.25,-0.64 1.25,0.64, height 1.1
DIOM5436X261N [mm]
  rrect23% 2.18x2.12 smd paste+0 mask+0.102: 1(-2.215,0) 2(2.215,0)
  silkscreen extent -3.9,-1.81 2.2,1.81, body extent -2.67,-1.81 2.67,1.81, height 2.65
FP-403AF-MFG [mm]
  rect 2.5x2.2 smd paste+0 mask+0: 1(-2.35,0) 2(2.35,0)
  silkscreen extent -4.27,-1.98 2.38,1.98, body extent -3.7,-2.07 3.7,2.07, height 0.25
FP-AMS1117-IPC_C [mm]
  rect 1.004x0.872 smd paste+0 mask+0: 1(-3.295,2.29)
  rrect100% 1.004x0.872 smd paste+0 mask+0: 2(-3.295,0) 3(-3.295,-2.29)
  rrect87% 1.004x3.182 smd paste+0 mask+0: 4(3.295,0)
  silkscreen extent -3.42,-3.25 1.75,3.62, body extent -3.53,-3.25 3.53,3.25, height 1.8
FP-C1206X104J3GACTU-MFG [mm]
  rect 1.22x1.86 smd paste+0 mask+0: 1(-1.39,0) 2(1.39,0)
  silkscreen extent -0.4,-0.98 0.41,0.97, body extent -1.65,-0.8 1.65,0.8, height 1.8
FP-CC0805-0_2-1_45-IPC_C [mm]
  rect 1.105x1.356 smd paste+0 mask+0: 1(-0.701,0) 2(0.701,0)
  silkscreen extent -1.25,-1.13 1.25,1.13, body extent -1,-0.63 1,0.63, height 1.45
FP-CSRN2010-IPC_B [mm]
  rect 1.305x2.608 smd paste+0 mask+0: 1(-2.301,0) 2(2.301,0)
  silkscreen extent -1.35,-1.3 1.35,1.3, body extent -3.2,-1.55 3.2,1.55, height 0.25
FP-DD-10-05-08-1699-IPC_B [mm]
  rect 0.881x0.242 smd paste+0 mask+0: 1(-1.416,1)
  rrect100% 0.881x0.242 smd paste+0 mask+0: 2(-1.416,0.5) 3(-1.416,0) 4(-1.416,-0.5) 5(-1.416,-1) 6(1.416,-1) 7(1.416,-0.5) 8(1.416,0) 9(1.416,0.5) 10(1.416,1)
  rect 1.65x2.48 smd paste-1000 mask+0: 11(0,0)
  silkscreen extent -2.53,-1.5 1.5,1.5, body extent -2.11,-1.75 2.11,1.75, height 0.25
FP-EEH-F-MFG [mm]
  rect 4x2 smd paste+0 mask+0: 1(-3.55,0) 2(3.55,0)
  silkscreen extent -6.25,-4.25 4.25,4.25, body extent -4.85,-4.15 4.85,4.15, height 10.51
FP-FTSH-107-01-F-DV-K-MFG [mm]
  rect 0.74x2.79 smd paste+0 mask+0: 1(-3.81,-2.035) 2(-3.81,2.035) 3(-2.54,-2.035) 4(-2.54,2.035) 5(-1.27,-2.035) 6(-1.27,2.035) 7(0,-2.035) 8(0,2.035) 9(1.27,-2.035) 10(1.27,2.035) 11(2.54,-2.035) 12(2.54,2.035) 13(3.81,-2.035) 14(3.81,2.035)
  silkscreen extent -4.51,-4.12 4.51,0.27, body extent -4.45,-2.92 4.45,2.92, height 6.38
FP-GRM21B-0_2-e0_2_0_7-IPC_B [mm]
  rect 1.255x1.456 smd paste+0 mask+0: 1(-0.826,0) 2(0.826,0)
  silkscreen extent -1.45,-1.13 1.45,1.13, body extent -1,-0.63 1,0.63, height 1.45
FP-NX3225GA-MFG [mm]
  rect 1.4x1.2 smd paste+0 mask+0: 1(-1.1,-0.8) 2(1.1,-0.8) 3(1.1,0.8) 4(-1.1,0.8)
  silkscreen extent -1.32,-2.22 0.03,1.3, body extent -1.6,-1.25 1.6,1.25, height 0.9
FP-PG-TO252-3-MFG#1 [mm]
  rect 1.2x2.2 smd paste-1000 mask+0: 1(-2.28,-5.08) 3(2.28,-5.08)
  rect 5.8x6.4 smd paste-1000 mask+0: 4(0,1.22)
  silkscreen extent -3.32,-3.11 3.32,3.11, body extent -3.42,-6.28 3.42,4.52, height 0.25
FP-PG-TO252-3-MFG#2 [mm]
  rect 1.5x2.5 smd paste+0 mask+0: 1(-2.3,-4.575) 3(2.3,-4.575)
  rect 7x7 smd paste+0 mask+0: 4(0,2.325)
  silkscreen extent -3.36,-2.29 3.37,-1.55, body extent -3.6,-5.92 3.6,5.92, height 0.25
JAE_MX23A18NF1 [mm]
  rect 1.8x1.8 / inner round 1.8 / far side rect 1.8x1.8 hole 1.2 mask+0.102: 1(10,4.5)
  round 1.8 hole 1.2 mask+0.102: 2(7.5,4.5) 3(5,4.5) 4(2.5,4.5) 5(0,4.5) 6(-2.5,4.5) 7(-5,4.5) 8(-7.5,4.5) 9(-10,4.5) 10(10,1.5) 11(7.5,1.5) 12(5,1.5) 13(2.5,1.5) 14(0,1.5) 15(-2.5,1.5) 16(-5,1.5) 17(-7.5,1.5) 18(-10,1.5)
  round 3.25 hole 3.25 unplated mask+0: ""(-15.5,0) ""(15.5,0)
  silkscreen extent -19,-6 19,6.35, body extent -19.13,-33.19 18.87,5.11, height 18.36
NET_TIE_GND#1 [mm]
  rect 1.5x0.45 on Mid2 mask+0.05: 1(0,0.762) 2(0,-0.762)
  Ground Plane region: -0.753,0.548 -0.753,-0.55 0.747,-0.55 0.747,0.548
NET_TIE_GND#2 [mm]
  rect 1.5x0.45 on Mid2 mask+0.05: 1(0,-0.762) 2(0,0.762)
  Ground Plane region: -0.753,-0.548 -0.753,0.55 0.747,0.55 0.747,-0.548
ONSC-SOT-23-3-318-08_V [mm] "SOT23, 3-Leads, Body 2.92x1.3mm, Pitch 0.95mm"
  rect 0.9x0.8 smd: 1(-1,0.95) 2(-1,-0.95) 3(1,0)
  silkscreen extent -1.12,-1.46 0.65,2.02, body extent -0.65,-1.46 0.65,1.46, height 1.11
REG_LT1117CST-3.3#TRPBF [mil]
  rect 59x39 smd: 1(-124,90.5) 2(-124,0) 3(-124,-90.5)
  rect 59x129 smd: 4(124,0)
  silkscreen extent -189,-132 73,132
RESC1005X37X20NL05T10 [mm] "Chip Resistor, 2-Leads, Body 1.00x0.50mm, IPC Medium Density"
  rect 0.55x0.55 smd: 1(-0.45,0) 2(0.45,0)
  body extent -0.53,-0.27 0.53,0.28, height 0.37
SHORT06-FP [mm]
  rect 0.6x0.6 on Mid2 paste-0.4 mask+0.102: 1(-0.4,0) 2(0.4,0)
  Ground Plane region: -0.2,0.3 -0.2,-0.3 0.2,-0.3 0.2,0.3
SOP63P602X175-16N [mm]
  rrect25% 1.64x0.41 smd paste+0 mask+0.102: 1(-2.635,2.222) 2(-2.635,1.588) 3(-2.635,0.953) 4(-2.635,0.318) 5(-2.635,-0.317) 6(-2.635,-0.952) 7(-2.635,-1.587) 8(-2.635,-2.222) 9(2.635,-2.222) 10(2.635,-1.588) 11(2.635,-0.953) 12(2.635,-0.318) 13(2.635,0.317) 14(2.635,0.952) 15(2.635,1.587) 16(2.635,2.222)
  silkscreen extent -4.37,-2.75 1.99,2.75, body extent -3,-2.45 3,2.45, height 1.75
SOT95P260X110-3N [mm] "SOT23, 3-Leads, Body 2.90x2.60mm, Pitch 0.95mm, IPC Medium Density"
  rect 1x0.6 smd paste+0 mask+0: 1(-1.025,0.95) 2(-1.025,-0.95) 3(1.025,0)
  silkscreen extent -1.39,-1.5 0.7,1.9, body extent -1.2,-1.45 1.2,1.45, height 1.1
SOT95P280X145-6N-7-V [mm] "SOT,0.95mm pitch;6 pin,1.60mm W X 2.90mm L X 1.45mm H body"
  rect 0.8x0.5 smd paste+0 mask+0: 1(-1.2,0.95) 2(-1.2,0) 3(-1.2,-0.95) 4(1.2,-0.95) 5(1.2,0) 6(1.2,0.95)
  silkscreen extent -1.42,-1.45 0.43,1.82, body extent -1.4,-1.45 1.4,1.45, height 1.45
STM-UFQFPN48_L [mm] "QFN, 48-Leads, Body 7.1x7.1mm, Pitch 0.5mm, Thermal Pad 5.6x5.6mm, IPC High Density"
  oval 0.8x0.25 smd: 1(-3.4,2.75) 2(-3.4,2.25) 3(-3.4,1.75) 4(-3.4,1.25) 5(-3.4,0.75) 6(-3.4,0.25) 7(-3.4,-0.25) 8(-3.4,-0.75) 9(-3.4,-1.25) 10(-3.4,-1.75) 11(-3.4,-2.25) 12(-3.4,-2.75) 25(3.4,-2.75) 26(3.4,-2.25) 27(3.4,-1.75) 28(3.4,-1.25) 29(3.4,-0.75) 30(3.4,-0.25) 31(3.4,0.25) 32(3.4,0.75) 33(3.4,1.25) 34(3.4,1.75) 35(3.4,2.25) 36(3.4,2.75)
  oval 0.25x0.8 smd: 13(-2.75,-3.4) 14(-2.25,-3.4) 15(-1.75,-3.4) 16(-1.25,-3.4) 17(-0.75,-3.4) 18(-0.25,-3.4) 19(0.25,-3.4) 20(0.75,-3.4) 21(1.25,-3.4) 22(1.75,-3.4) 23(2.25,-3.4) 24(2.75,-3.4) 37(2.75,3.4) 38(2.25,3.4) 39(1.75,3.4) 40(1.25,3.4) 41(0.75,3.4) 42(0.25,3.4) 43(-0.25,3.4) 44(-0.75,3.4) 45(-1.25,3.4) 46(-1.75,3.4) 47(-2.25,3.4) 48(-2.75,3.4)
  rect 5.6x5.6 smd: 49(0,0)
  silkscreen extent -4.48,-3.7 3.7,3.7, body extent -3.55,-3.55 3.55,3.55, height 0.6
TO252 [mm]
  rect 1x1.6 smd: 1(-2.28,-4.8) 2(2.28,-4.8)
  rect 5.4x6.2 smd: 3(0,2.5)
  silkscreen extent -3.28,-3.03 3.28,3.84, body extent -3.24,-4.7 3.3,5.21, height 2.52
WCAP-FTBP_L13W5.5H11 [mm] "Film Capacitors, 13.00 x 5.50 mm"
  round 1.4 hole 0.9: 1(-5,0) 2(5,0)
  silkscreen extent -7.35,-3.35 7.35,3.35, body extent -6.5,-2.75 6.5,2.75, height 11.05
WL-SMCW_0805_150080xx75000 [mm] "SMD Mono-color Chip LED, body 2.0x1.25mm"
  rect 1.1x1.3 smd: 1(-1.05,0) 2(1.05,0)
  silkscreen extent -2,-0.6 -1.8,0.6, body extent -1,-0.63 1,0.62, height 0.7

## Part data
C1 C6: library part Capacitor_THT_22.5mm
C2 C3 C4 C5 C7 C8 C9 C10 C11 C12 C13 C14 C15 C22 C24 C25 C26 C27 C28 C29 C30 C31 C32 C33 C34 C38 C39 C40 C41 C44 C45 C46 C50 C51 C54 C55 R1 R2 R3 R4 R5 R6 R7 R8 R9 R10 R11 R12 R13 R14 R15 R16 R17 R18 R19 R20 R21 R22 R23 R24 R25 R26 R27 R28 R29 R30 R31 R32 R33 R34 R35 R36 R39 R42 R43 R48 R52 R55 R56 R62 R65 R66 R67 R68 R69: Package=0402
  C2 C3 C4 C5 C7 C8 C9 C10 C11 C12 C13 C14 C15 C22 C24 C25 C26 C27 C28 C29 C30 C31 C32 C33 C34 C38 C39 C40 C41 C44 C45 C46 C50 C51 C54 C55 R1 R2 R3 R4 R5 R6 R7 R8 R9 R10 R11 R12 R13 R14 R15 R16 R17 R18 R19 R20 R21 R22 R23 R24 R25 R26 R27 R28 R29 R30 R31 R32 R42 R43 R48 R52 R55 R56 R62 R65 R66 R67: Format=0402
C16 C17: library part CMP-05428-000892-1, "Conductive Polymer Hybrid Aluminum Electrolytic Capacitors 220uF ±20% 25V RADIAL SMT 8x10.2mm"
C18 C19 C20 C21: library part CMP-03020-034648-1, "CAP CER 0.1UF 25V C0G/NP0 1206", RoHS Compliant=Yes
C23: library part CMP-1035-02787-2, Manufacturer="AVX Interconnect / Elco", Part Number=0603ZD475MAT2A
C35 C36 C43: library part Capacitor_0603, Package=0402, Format=0402
C37 C42: library part CMP-03913-89437304-2, "Cap, 0.1Uf, 400V, Film, Radial Rohs Compliant: Yes", Capacitance=100nF, ESR (Equivalent Series Resistance)=38.46mΩ, Insulation Resistance=30GΩ, Voltage Rating=400V, Height=11mm, Length=13mm, Packaging=Carton, Pin Length=4mm, Pitch=10mm, RoHS=Compliant, Width=5.5mm
C47 C48: library part CMP-03422-001497-1, "CAP CER 22UF 25V X5R 0805", Capacitance=22uF, Case Code (Imperial)=0805, Case Code (Metric)=2012, Dielectric=X5R, Max Operating Temperature=85°C, Min Operating Temperature=-55°C, Package Quantity=3000, Tolerance=20%, Voltage Rating=25V, Case/Package=0805, Halogen Free="Halogen Free", Height=1.25mm, Lead Free="Lead Free", Length=0.079inch, Mount="Surface Mount", Packaging="Tape and Reel", RoHS Compliant=Yes, Termination=SMD/SMT, Thickness=0.057inch, Voltage Rating (DC)=25V, Weight=0.000194oz, Width=0.049inch
C49: library part CMP-2007-04523-1, Manufacturer="AVX Interconnect / Elco", Part Number=0805ZG106ZAT2A
C52 C53: library part CMP-06035-042633-1, "Chip Multilayer Ceramic Capacitors for General Purpose, 0805, 47uF, X5R, 15%, 20%, 10V", Capacitance=47uF, Case Code (Imperial)=0805, Case Code (Metric)=2012, Dielectric=X5R, Max Operating Temperature=85°C, Min Operating Temperature=-55°C, Package Quantity=10000, Tolerance=20%, Voltage Rating=10V, Case/Package=0805, Length=0.079inch, Mount="Surface Mount", Packaging="Tape and Reel", Termination=SMD/SMT, Thickness=0.057inch, Voltage Rating (DC)=10V, Weight=0.000335oz, Width=0.049inch
D1 D2 D8 D9 D10: "SOD-323, 200mW, 2%, 15V, Zener Diode", Package="SOD-323-2 Taiwan Semiconductor", Check_prices=https://www.snapeda.com/parts/BZT52B15SH%20RRG/Taiwan+Semiconductor+Corporation/view-part/?ref=eda, MF="Taiwan Semiconductor Corporation", MP="BZT52B15SH RRG", SnapEDA_Link=https://www.snapeda.com/parts/BZT52B15SH%20RRG/Taiwan+Semiconductor+Corporation/view-part/?ref=snap
D3: library part CMP-1426-00011-3, "LED Uni-Color Red 630nm 2-Pin Chip 0805(2012Metric) T/R", Case Code (Imperial)=0805, Case Code (Metric)=2012, Color=Red, Forward Current=100mA, Forward Voltage=2V, Max Junction Temperature (Tj)=95°C, Max Operating Temperature=85°C, Max Reverse Voltage (DC)=5V, Min Operating Temperature=-40°C, Power Dissipation=72mW, Test Current=20mA, Case/Package=0805, Dominant Wavelength=625nm, Height=700µm, Length=2mm, Lens Style="Clear, Rectangular", Luminous Intensity=150mcd, Mount="Surface Mount", Packaging="Tape and Reel", Peak Wavelength=630nm, REACH SVHC=Unknown, RoHS=Compliant, Viewing Angle=140°, Wavelength=625nm, Width=1.25mm
D4: library part CMP-1426-00007-3, "WURTH ELEKTRONIK - 150080GS75000 - LED, Green, SMD, 0805, 30 mA, 3.2 V, 520 nm", Case Code (Imperial)=0805, Case Code (Metric)=2012, Color=Green, Forward Current=100mA, Forward Voltage=3.2V, Max Junction Temperature (Tj)=95°C, Max Operating Temperature=85°C, Max Reverse Voltage (DC)=5V, Min Operating Temperature=-40°C, Power Dissipation=105mW, Test Current=20mA, Case/Package=0805, Dominant Wavelength=525nm, Height=700µm, Length=2mm, Lens Style="Clear, Rectangular", Luminous Intensity=450mcd, Mount="Surface Mount", Packaging="Tape and Reel", Peak Wavelength=515nm, REACH SVHC=Unknown, Reverse Voltage=5V, RoHS=Compliant, Viewing Angle=140°, Wavelength=525nm, Width=1.25mm
D5 D7: library part CMP-00278-84331306-1, "S3JB Rectifier Diode, 1 Phase, 1 Element, 3A, 600V V(RRM), Silicon, DO-214AA", Average Rectified Current=3A, Capacitance=40pF, Case/Package=SMB, Manufacturer Lifecycle Status=ACTIVE, Max Forward Surge Current (Ifsm)=80A, Max Junction Temperature (Tj)=150°C, Max Repetitive Reverse Voltage (Vrrm)=600V, Min Operating Temperature=-55°C, Peak Reverse Current=10µA, Element Configuration=Single, Forward Current=3A, Height=2.65mm, Lifecycle Status=Production, Max Operating Temperature=150°C, Max Reverse Voltage (DC)=600V, Mount="Surface Mount", NexarPartId=84331306, Packaging="Cut Tape", Reverse Recovery Time=1.5µs, Reverse Voltage=600V, RoHS=Compliant, Schedule B="8541100080, 8541100080", Weight=180mg
D6: library part CMP-20229-000002-1, "DIODE ZENER 3.3V 125MW 0402", Case Code (Imperial)=0402, Case Code (Metric)=1006, Max Operating Temperature=125°C, Max Power Dissipation=125mW, Max Reverse Leakage Current=25uA, Min Operating Temperature=-55°C, Package Quantity=5000, Tolerance=5%, Zener Current=5mA, Zener Voltage=3.3V, Case/Package=0402, Element Configuration=Single, Impedance=95R, Mount="Surface Mount", Packaging="Cut Tape", Power Dissipation=125mW
D11 D12: "Pince 648V 900mA Ipp TVS Diode Surface Mount DO-214AA (SMBJ)", Package="DO-214 Littelfuse", Check_prices=https://www.snapeda.com/parts/SMBJ400A/Littelfuse/view-part/?ref=eda, MF=Littelfuse, MP=SMBJ400A, SnapEDA_Link=https://www.snapeda.com/parts/SMBJ400A/Littelfuse/view-part/?ref=snap
J1: library part CMP-02766-001448-1, "CONN HEADER SMD 14POS 1.27MM", Color=Black, Max Operating Temperature=125°C, Min Operating Temperature=-55°C, Package Quantity=1, Connector Type="Male Pin", Contact Material=Bronze, Contact Mating Length=0.12inch, Contact Plating=Gold, Contact Type="Male Pin", Depth=5.84mm, Gender=Male, Housing Color=Black, Housing Material=Polymer, Lead Free="Lead Free", Length=8.89mm, Mount="Surface Mount", Number of Contacts=14, Number of Positions=14, Number of Rows=2, Orientation=Straight, Packaging=Rail/Tube, Pitch=1.27mm, Radiation Hardening=No, RoHS Compliant=Yes, Row Spacing=0.05inch, Series=FTSH, Termination=Solder
J2: Package=None, Check_prices=https://www.snapeda.com/parts/MX23A18NF1/JAE+Electronics/view-part/?ref=eda, MF="JAE Electronics", MP=MX23A18NF1, SnapEDA_Link=https://www.snapeda.com/parts/MX23A18NF1/JAE+Electronics/view-part/?ref=snap
Q1 Q2: library part CMP-00196-57372565-1, "IPD60R180C7ATMA1 Trans MOSFET N-CH 600V 13A 3-Pin(2+Tab) DPAK T/R", Case/Package=TO-252-3, Continuous Drain Current (ID)=13A, Drain To Source Breakdown Voltage=600V, Drain To Source Resistance=155mΩ, Gate to Source Voltage (Vgs)=20V, Input Capacitance=1.08nF, Max Junction Temperature (Tj)=150°C, Max Power Dissipation=68W, Min Operating Temperature=-55°C, On-State Resistance=180mΩ, Package Quantity=2500, Drain to Source Voltage (Vdss)=600V, Halogen Free="Halogen Free", Height=2.5mm, Lead Free="Contains Lead", Lifecycle Status=Production, Max Dual Supply Voltage=600V, Max Operating Temperature=150°C, Mount="Surface Mount", NexarPartId=57372565, Number Of Channels=1, Packaging="Tape & Reel", Power Dissipation=68W, Rds On Max=180mΩ, RoHS=Compliant, Turn-Off Delay Time=50ns, Turn-On Delay Time=9.3ns
Q3 Q4: library part CMP-1058-00778-1, "Power MOSFET, 30 V, 2.1 A, Single N-Channel, 3-Pin SOT-23, Pb-Free, Tape and Reel", Manufacturer="On Semiconductor", Package Type=SOT-23-3, Channel Polarity="N Channel", Ciss Typ (pF)=140, ComponentLink1Description="Manufacturer URL", ComponentLink1URL=http://www.onsemi.com/, ComponentLink2Description=Datasheet, ComponentLink2URL=http://www.onsemi.cn/pub_link/Collateral/MGSF1N03LT1-D.PDF, ComponentLink3Description="Package Specification", ComponentLink3URL=http://www.onsemi.cn/pub_link/Collateral/318-08.PDF, Configuration=Single, Coss Typ (pF)=100, Crss Typ (pF)=40, DatasheetVersion="Rev. 10", ID Max (A)=2.1, Mounting Technology="Surface Mount", PackageDescription="3-Pin Small Outline Transistor, Body 2.92 x 1.3 mm, Pitch 0.95 mm", PackageReference=SOT-23-3-318-08, PackageVersion="Rev. AP, 11/2009", Packing="Tape and Reel", PartNumber=MGSF1N03LT1G, RoHS=Pb-Free, V(BR)DSS Min (V)=30, VGS Max (V)=20, VGS(th) Max (V)=2.4
Q5: "P-Channel 40V 10.8A (Ta), 50A (Tc) 2.4W (Ta), 69W (Tc) Surface Mount D-PAK (TO-252AA)", Package="TO-252-3 ON Semiconductor", Check_prices=https://www.snapeda.com/parts/FDD4141/Onsemi/view-part/?ref=eda, MF=onsemi, MP=FDD4141, SnapEDA_Link=https://www.snapeda.com/parts/FDD4141/Onsemi/view-part/?ref=snap
Q6: "Insulated-Gate Field-Effect Transistor (IGFET), N-Channel, Enhancement, Body Diode, Pin 1 Gate, 2 Source, 3 Drain, 3 Pins", Manufacturer="Infineon Technologies", ManufacturerPartNumber=BSS316N, PackageReference=PG-SOT23-3-5
Q7 Q8: library part CMP-32901-000143-1, "MOSFET N-CH 30V 161A DPAK", Continuous Drain Current=161A, Drain To Source Breakdown Voltage=30V, Drain To Source Resistance=3.2mΩ, Gate To Source Voltage=20V, Input Capacitace At Vds="4380pF @ 15V", Manufacturer=Infineon, Manufacturer Part Number=IRLR7843TRPBF, Max Forward Diode Voltage=1V, Max Junction Temp=+175°C, Package=PG-TO252-3, Power Dissipation=140W, Pulse Drain Current=620A, Temperature="-55°C to +175°C", Temperature Range Low=-55°C, Automotive=No, Category=Trans, ComponentLink2Description=Datasheet, ComponentLink2URL=https://www.infineon.com/dgdl/irlr7843pbf.pdf?fileId=5546d462533600a40153566de53526d8, Depletion Mode=False, Device Class L1="Discrete Semiconductors", Device Class L2=Transistors, Device Class L3=MOSFETs, Digikey Description="MOSFET N-CH 30V 161A DPAK", Drain To Source Voltage=30V, Footprint Url=https://www.infineon.com/cms/en/product/packages/PG-TO252/PG-TO252-3-901/, Gate Charge At Vgs="34nC @ 4.5V", Height=2.52mm, Lead Free=Yes, Number Of Channels=1, Number Of N Channels=1, Octopart=https://octopart.com/irlr7843trpbf-infineon-65875062, Reverse Recovery Charge=36nC, Reverse Recovery Time=39ns, RoHS=TRUE, Rthja Max=50°C/W, Temperature Range High=+175°C, Threshold Vgs Max=2.3V, Threshold Vgs Min=1.4V, Turn Off Delay Time=34ns, Turn On Delay Time=25ns
R37 R38: library part CMP-2002-02518-1, Manufacturer="Vishay BCcomponents", Part Number=MCS04020D5600BE100
R49 R61: library part CMP-26527-002648-1, "Res Thick Film 2010 20mΩ 1% 1W ±250ppm/°C Molded SMD Plastic T/R", Case Code (Imperial)=2010, Case Code (Metric)=5025, Max Operating Temperature=155°C, Max Power Dissipation=1W, Min Operating Temperature=-55°C, Package Quantity=1, Resistance="12 mΩ", Resistor Type="Thick Film", Temperature Coefficient=250ppm/°C, Tolerance=1%, Case/Package=2010, Contact Plating=Tin, Height=0.03inch, Lead Free="Lead Free", Length=0.197inch, Mount="Surface Mount", Number of Terminations=2, Packaging="Tape and Reel", Power Rating=1W, Radiation Hardening=No, RoHS Compliant=Yes, Series=CSRN, Size Code=2010, Width=0.097inch
RJ1: library part CMP-009-00121-2, Max Operating Temperature=155°C, Min Operating Temperature=-55°C, Pins=2
T1 T2: "Flyback Transformer for Linear Technology LT3750  Reference: http://www.coilcraft.com/da2032.cfm  L - 10 uH TurnsRatio Pri:Sec - 1:10 Ipeak - 10.0 A Interwinding capacitance - 128 pF DCRmax: Pri - 0.018, Sec - 1.75 Ohms", Package=None, Availability=Unavailable, MP=DA2034-AL, Price=None
U1 U2: "EiceDRIVER, Fast Single Channel 4A/8A Low-Side Gate Driver, UVLO - 4.2V", Manufacturer="Infineon Technologies", ManufacturerPartNumber=1EDN7511B, PackageReference=PG-SOT23-6-2
U3: "Variable-Reluctance Sensor Interface with Differential Input and Adaptive Peak Threshold", Package="QSOP-16 Maxim", Check_prices=https://www.snapeda.com/parts/MAX9927AEE+/Analog+Devices/view-part/?ref=eda, MF="Analog Devices", MP=MAX9927AEE+, SnapEDA_Link=https://www.snapeda.com/parts/MAX9927AEE+/Analog+Devices/view-part/?ref=snap
U4: library part CMP-0243-00165-1, "ARM Cortex-M4 32-bit MCU+FPU, 512 KB Flash, 128 KB RAM, 36 I/Os, 48-Pin UFQFPN, -40 to 85 degC, Tray", I/Os (High Current)=36, Operating Frequency(F) (Processor speed) (MHz)=100, Package Description=UFQFPN48, Package Reference="48-Pin Ultra Thin Fine Pitch Quad Flat No-Lead, 7 x 7 x 0.6 mm Body, 0.5 mm Pitch, Exposed Pad", Supply Voltage(Vcc) min (V)=1.7, ComponentLink1Description="Manufacturer URL", ComponentLink1URL=http://www.st.com/, ComponentLink2Description=Datasheet, ComponentLink2URL=http://www.st.com/st-web-ui/static/active/en/resource/technical/document/datasheet/DM00115249.pdf, Core="ARM Cortex-M4", DatasheetVersion="Rev. 6", FLASH Size (Prog) (kB)=512, Internal RAM Size (kB)=128, Mounting Technology="Surface Mount", Packing=Tray
U5 U6: library part CMP-09139-000585-1, "IC REG CTRLR MULT TOPOLOGY 10DFN", Case/Package=DFN, Max Frequency=1MHz, Max Input Voltage=100V, Max Operating Temperature=125°C, Max Output current=1.2A, Max Output Voltage=12V, Min Input Voltage=5.5V, Min Operating Temperature=-40°C, Package Quantity=121, Height=0.7mm, Length=3mm, Max Supply Voltage=100V, Min Supply Voltage=5.5V, Mount="Surface Mount", Number of Outputs=1, Number of Pins=10, Output Voltage=100V, Packaging=Rail/Tube, REACH SVHC="No SVHC", RoHS Compliant=Yes, Series=-, Switching Frequency=1MHz, Topology=Boost, Width=3mm
U7: "LT1117 - 800mA Low Dropout Positive Regulators Adjustable and Fixed 2.85V, 3.3V, 5V", Package=None, Availability=Unavailable, MF="{'manufacturer': u'Analog Devices Inc.'}", MP=LT1117CST-3.3#TRPBF, Price=None
U8: library part CMP-209535-000001-1, "LDO Voltage Regulators 1A, 3.3V", Dropout Voltage=1.1V, Manufacturer="Advanced Monolithic Systems", Max Junction Temp=+125°C, Max Power Dissipation=1.2W, Max Supply Voltage=15V, Nominal Supply Current=5mA, Output Current=1A, Output Voltage=3.3V, Package=AMS1117, Temperature="-40°C to +125°C", Temperature Range Low=-40°C, Automotive=No, Category=IC, ComponentLink2Description=Datasheet, ComponentLink2URL=http://www.advanced-monolithic.com/pdf/ds1117.pdf, Device Class L1="Integrated Circuits (ICs)", Device Class L2="Power Management ICs", Device Class L3="Voltage Regulators - Linear", Height=1.8mm, Ipc Land Pattern Name=SOT229P700X180-4, Lead Free=Yes, Manufacturer Part Number=AMS1117-3.3, Number of Outputs=1, Octopart=https://octopart.com/ams1117-3.3-advanced+monolithic+systems-25899300, Output Type=Fixed, RoHS=TRUE, Standoff Height=0.64mm, Temperature Range High=+125°C
Y1: library part CMP-200220-000007-1, "CRYSTAL 16.0000MHZ 8PF SMD", Case/Package=SMD/SMT, ESR (Equivalent Series Resistance)=80R, Frequency=16MHz, Frequency Stability=30ppm, Frequency Tolerance=20ppm, Load Capacitance=8pF, Max Operating Temperature=85°C, Min Operating Temperature=-40°C, Package Quantity=3000, Height=0.035inch, Length=0.126inch, Mount="Surface Mount", Number of Pins=4, Packaging="Tape and Reel", Width=0.098inch

## Free pads (board coordinates)
  round 1 smd: 4(-34.925,0.508) 4(-7.493,-27.051) 4(-1.143,-15.748) 4(31.369,32.131) 4(32.645,-0.374) 5(-23.749,2.159) 5(19.304,4.191)
  rect 0.11x0.01 hole 4.3 unplated mask+0.05: 6(-32.385,-38.735) 6(-32.385,39.15) 6(31.864,39.15)
  rect 0.11x0.01 hole 3.4 unplated mask+0.05: 6(31.623,-30.861)

## Via types
v1: diameter 0.6, hole 0.3, Top to Bottom, 251 vias
v2: diameter 1, hole 0.5, Top to Bottom, 57 vias
v3: diameter 0.5, hole 0.2, Top to Bottom, 25 vias
v4: diameter 0.8, hole 0.4, Top to Bottom, 11 vias
v5: diameter 0.5, hole 0.3, Top to Bottom, 7 vias
v6: diameter 0.45, hole 0.3, Top to Bottom, 3 vias
v7: diameter 0.55, hole 0.3, Top to Bottom, 1 vias

## Nets (pads, with @x,y where several pads share a name; then routed paths per layer and width w, separated by ;. In a path a pad name is that pad's centre, name@x,y a point inside that pad or via, vN(x,y) a via of type N, cw(c..) or ccw(c..) an arc to the next point about the centre after c; other vN are vias at no path point)
3V3: C24.1 C25.1 C26.1 C27.1 C28.1 C29.1 C30.1 C31.1 C32.1 C49.2 J1.3 pad.4@-1.143,-15.748 R11.1 R15.1 R34.1 R36.1 R68.2 R69.2 U4.1 U4.9 U4.24 U4.36 U4.48 U8.2 U8.4 | length 139.1
  Top w0.4: R15.1@-10.982,0.099 -10.982,-0.91 ; v1(-10.795,-2.159) -10.795,-2.105 -10.982,-1.918 -10.982,-0.91 ; R11.1@-10.16,-0.889 -10.181,-0.91 -10.982,-0.91 ; v1(-1.524,-16.383) -1.486,-16.345 -1.486,-16.253 -1.143,-15.91 pad.4@-1.143,-15.748 -1.028,-15.633 pad.4@-0.824,-15.633
  Power Plane w0.4: v1(-3.175,-11.171) -3.175,-11.225 -3.068,-11.332 -3.068,-11.878 -2.478,-12.467 -1.878,-12.467 -1.192,-13.153 -1.192,-14.817 -1.181,-14.828 -1.181,-15.075 -1.524,-15.417 v1(-1.524,-16.383) ; -1.388,-12.792 -0.64,-12.792 -0.329,-12.481 1.108,-12.481 4.064,-9.525 4.064,-7.747 ; v5(4.318,-1.016) 3.429,-1.905 3.429,-7.112 4.064,-7.747 ; v1(5.228,-6.461) 4.064,-7.625 4.064,-7.747
  Power Plane w0.5: v1@-10.814,-2.286 -8.763,-2.286 -8.763,-2.729 ; v1(-5.219,-1.205) -7.239,-1.205 -8.763,-2.729 ; v1(-3.175,-11.171) -5.085,-11.171 -6.604,-9.652 -6.604,-9.525 -7.747,-8.382 -7.747,-6.846 -9.171,-5.422 -9.171,-4.269 -9.463,-3.977 -9.463,-3.139 -9.053,-2.729 -8.763,-2.729 ; v1(11.938,-2.159) 19.05,-2.159 20.701,-3.81 20.701,-5.207 20.828,-5.334
  Power Plane w0.6: v1(10.922,-15.439) 11.269,-15.786 17.869,-15.786 20.828,-12.827 20.828,-5.334 28.238,2.076 v1(34.32,2.076)
  Bottom w0.25: C32.1@-3.34,-9.309 -2.75,-8.719 U4.24@-2.75,-8.48 ; U4.48@2.75,-1.68 U4.48@2.75,-1.405 ; U4.9@3.4,-6.33 4.298,-6.33 4.318,-6.35 4.832,-6.35 v1@4.954,-6.472 ; U4.1@3.4,-2.33 4.455,-2.33 C24.1@4.55,-2.425
  Bottom w0.3: C26.1@-4.679,-1.69 -4.36,-1.69 -4.36,-1.736 -3.937,-2.159 -3.796,-2.159 -3.625,-2.33 U4.36@-3.4,-2.33
  Bottom w0.4: C25.1@-5.68,-1.701 C26.1@-4.713,-1.701 ; C31.1@-3.428,-10.494 -3.511,-10.644 -3.511,-10.742 ccw(c-3.111,-10.742) -3.318,-11.084 v1(-3.175,-11.171) ; C32.1@-3.428,-9.559 -3.454,-9.709 -3.454,-10.344 C31.1@-3.349,-10.461 ; v1(-1.524,-16.383) -1.524,-19.431 0.381,-21.336 3.429,-21.336 4.709,-20.056 ccw(c4.426,-19.773) 4.826,-19.773 4.826,-15.56 ccw(c4.116,-15.56) 4.618,-15.058 ; J1.3@29.34,1.27 30.535,1.44 31.414,1.723 32.656,1.723 33.299,1.387 33.631,1.387 v1(34.32,2.076)
  Bottom w0.5: R34.1@-11.557,-2.794 -11.557,-2.744 -11.118,-2.305 -10.968,-2.305 -10.822,-2.159 v1(-10.795,-2.159) ; R36.1@-10.922,-1.778 -10.922,-1.828 -10.814,-1.936 -10.814,-2.14 v1(-10.795,-2.159) ; R68.2@-9.652,-3.429 -9.702,-3.429 -10.776,-2.355 -10.776,-2.178 v1(-10.795,-2.159) ; -5.222,-1.69 v1(-5.219,-1.205) ; v1@5.274,-6.461 C30.1@6.008,-6.472 ; C30.1@5.95,-6.533 C27.1@6.858,-6.533 ; R69.2@11.684,-2.667 11.734,-2.667 11.784,-2.617 11.784,-2.34 11.938,-2.186 v1(11.938,-2.159)
  Bottom w1: U8.2@3.563,-15.058 4.618,-15.058 5.461,-15.058 5.842,-15.439 10.151,-15.439 U8.4@10.153,-15.058 10.155,-15.439 C49.2@11.955,-15.439
5V0: C8.1 C50.1 C51.1 C52.1 C53.1 J2.16 R21.2 R22.2 U3.1 U3.8 U3.14 U7.2 U7.4 U8.3 | length 77.3
  Top w1: C51.1@1.016,-12.865 2.358,-12.865 C50.1@2.404,-12.911 2.581,-12.734 3.175,-12.734
  Power Plane w0.5: v1(-9.271,13.97) -2.667,13.97 -2.794,13.843 v1(-2.794,12.7) ; -1.27,13.97 -0.508,14.732 -0.281,14.732 ; v1(0.381,15.367) 0.354,15.367 -0.281,14.732 ; v7(1.651,12.573) -0.281,14.505 -0.281,14.732
  Power Plane w1.3: v2(-18.669,12.7) v2(-18.669,15.367) -18.669,21.971 -15.113,25.527 -15.113,33.466 -9.971,38.608 3.556,38.608 4.857,37.307 4.857,35.275 J2.16@4.953,35.179
  Bottom w0.3: C53.1@-17.293,16.925 C53.1@-17.268,16.9 ; U7.2@-10.947,14.351 -10.886,14.351 -10.541,14.006 v1(-10.541,13.848) ; R22.2@-3.556,10.668 -3.532,10.692 -2.786,10.692 -2.73,10.747 U3.8@-2.73,11.335 -2.762,11.367 -2.762,12.668 v1(-2.794,12.7) ; v1(0.381,15.367) 0.413,15.399 0.413,16.593 U3.14@0.445,16.625 ; R21.2@1.524,9.906 1.659,10.041 1.659,11.28 U3.1@1.714,11.335 ; v7(1.651,12.573) 1.714,12.509 U3.1@1.714,11.335 ; C8.1@2.667,11.303 1.746,11.303 U3.1@1.714,11.335
  Bottom w0.4: v1(2.975,-12.434) 3.013,-12.472 3.073,-12.472 3.369,-12.768 U8.3@3.563,-12.768
  Bottom w0.6: U7.4@-17.247,15.703 C53.1@-17.247,17.056
  Bottom w1.3: v2(-18.669,12.7) -18.009,12.7 -17.247,13.462 U7.4@-17.247,14.351 ; v2(-18.669,15.367) -17.583,15.367 U7.4@-17.247,15.703
ADC1_IN1: U4.12
ADC1_IN2: U4.14
ADC_SENSOR_1: J2.7 R33.1 | length 48.1
  Top w0.4: J2.7@4.953,32.179 4.953,30.48 3.175,28.702 3.175,20.955 7.239,16.891 7.239,11.938 v1(10.922,8.255) ; v1(11.049,-4.699) v1(11.049,-1.397)
  Bottom w0.4: R33.1@6.066,-9.37 6.966,-9.37 8.152,-8.184 8.152,-7.977 11.011,-5.118 11.011,-4.737 v1(11.049,-4.699) ; v1(10.922,8.255) 10.922,8.201 11.049,8.074 v1(11.049,-1.397)
ANALOG_SENSOR_1: C22.2 R33.2 R35.2 U4.16 | length 6.6
  Bottom w0.25: U4.16@1.25,-8.48 1.25,-9.251 1.524,-9.525 R33.2@4.761,-9.525 ; C22.2@3.224,-10.14 R35.2@4.166,-10.14 4.216,-10.14 4.761,-9.595 4.875,-9.595 5.05,-9.42 R33.2@5.05,-9.37
ANALOG_SENSOR_2: U4.17 | length 0.3
  Bottom w0.25: U4.17@0.75,-8.755 U4.17@0.75,-8.48
BIAS1: C10.1 C11.1 R20.1 R21.1 R25.1 U3.3 | length 9.3
  Bottom w0.3: C10.1@-0.635,8.928 -0.546,9.017 R25.1@0.508,9.017 R21.1@0.508,9.906 0.508,10.656 0.445,10.72 U3.3@0.445,11.335 0.445,13.271 1.778,14.605 R20.1@2.794,14.605 C11.1@2.794,13.716
BIAS2: C12.1 C13.1 R18.1 R22.1 R26.1 U3.6 | length 7.1
  Bottom w0.4: R18.1@-5.334,8.636 C13.1@-4.318,8.636 R26.1@-3.302,8.636 ; R22.1@-3.556,9.652 -3.556,8.84 -3.352,8.636 R26.1@-3.302,8.636 ; C12.1@-2.159,8.928 -2.351,8.736 -3.202,8.736 R26.1@-3.302,8.636 ; C12.1@-2.134,8.928 -1.859,9.203 -1.859,9.571 -1.46,9.97 U3.6@-1.46,11.335 U3.6@-1.466,11.34